# EAGLE board Base_Block-GiantPanel-v10 (EAGLE 6.6.0), part 1 of 15
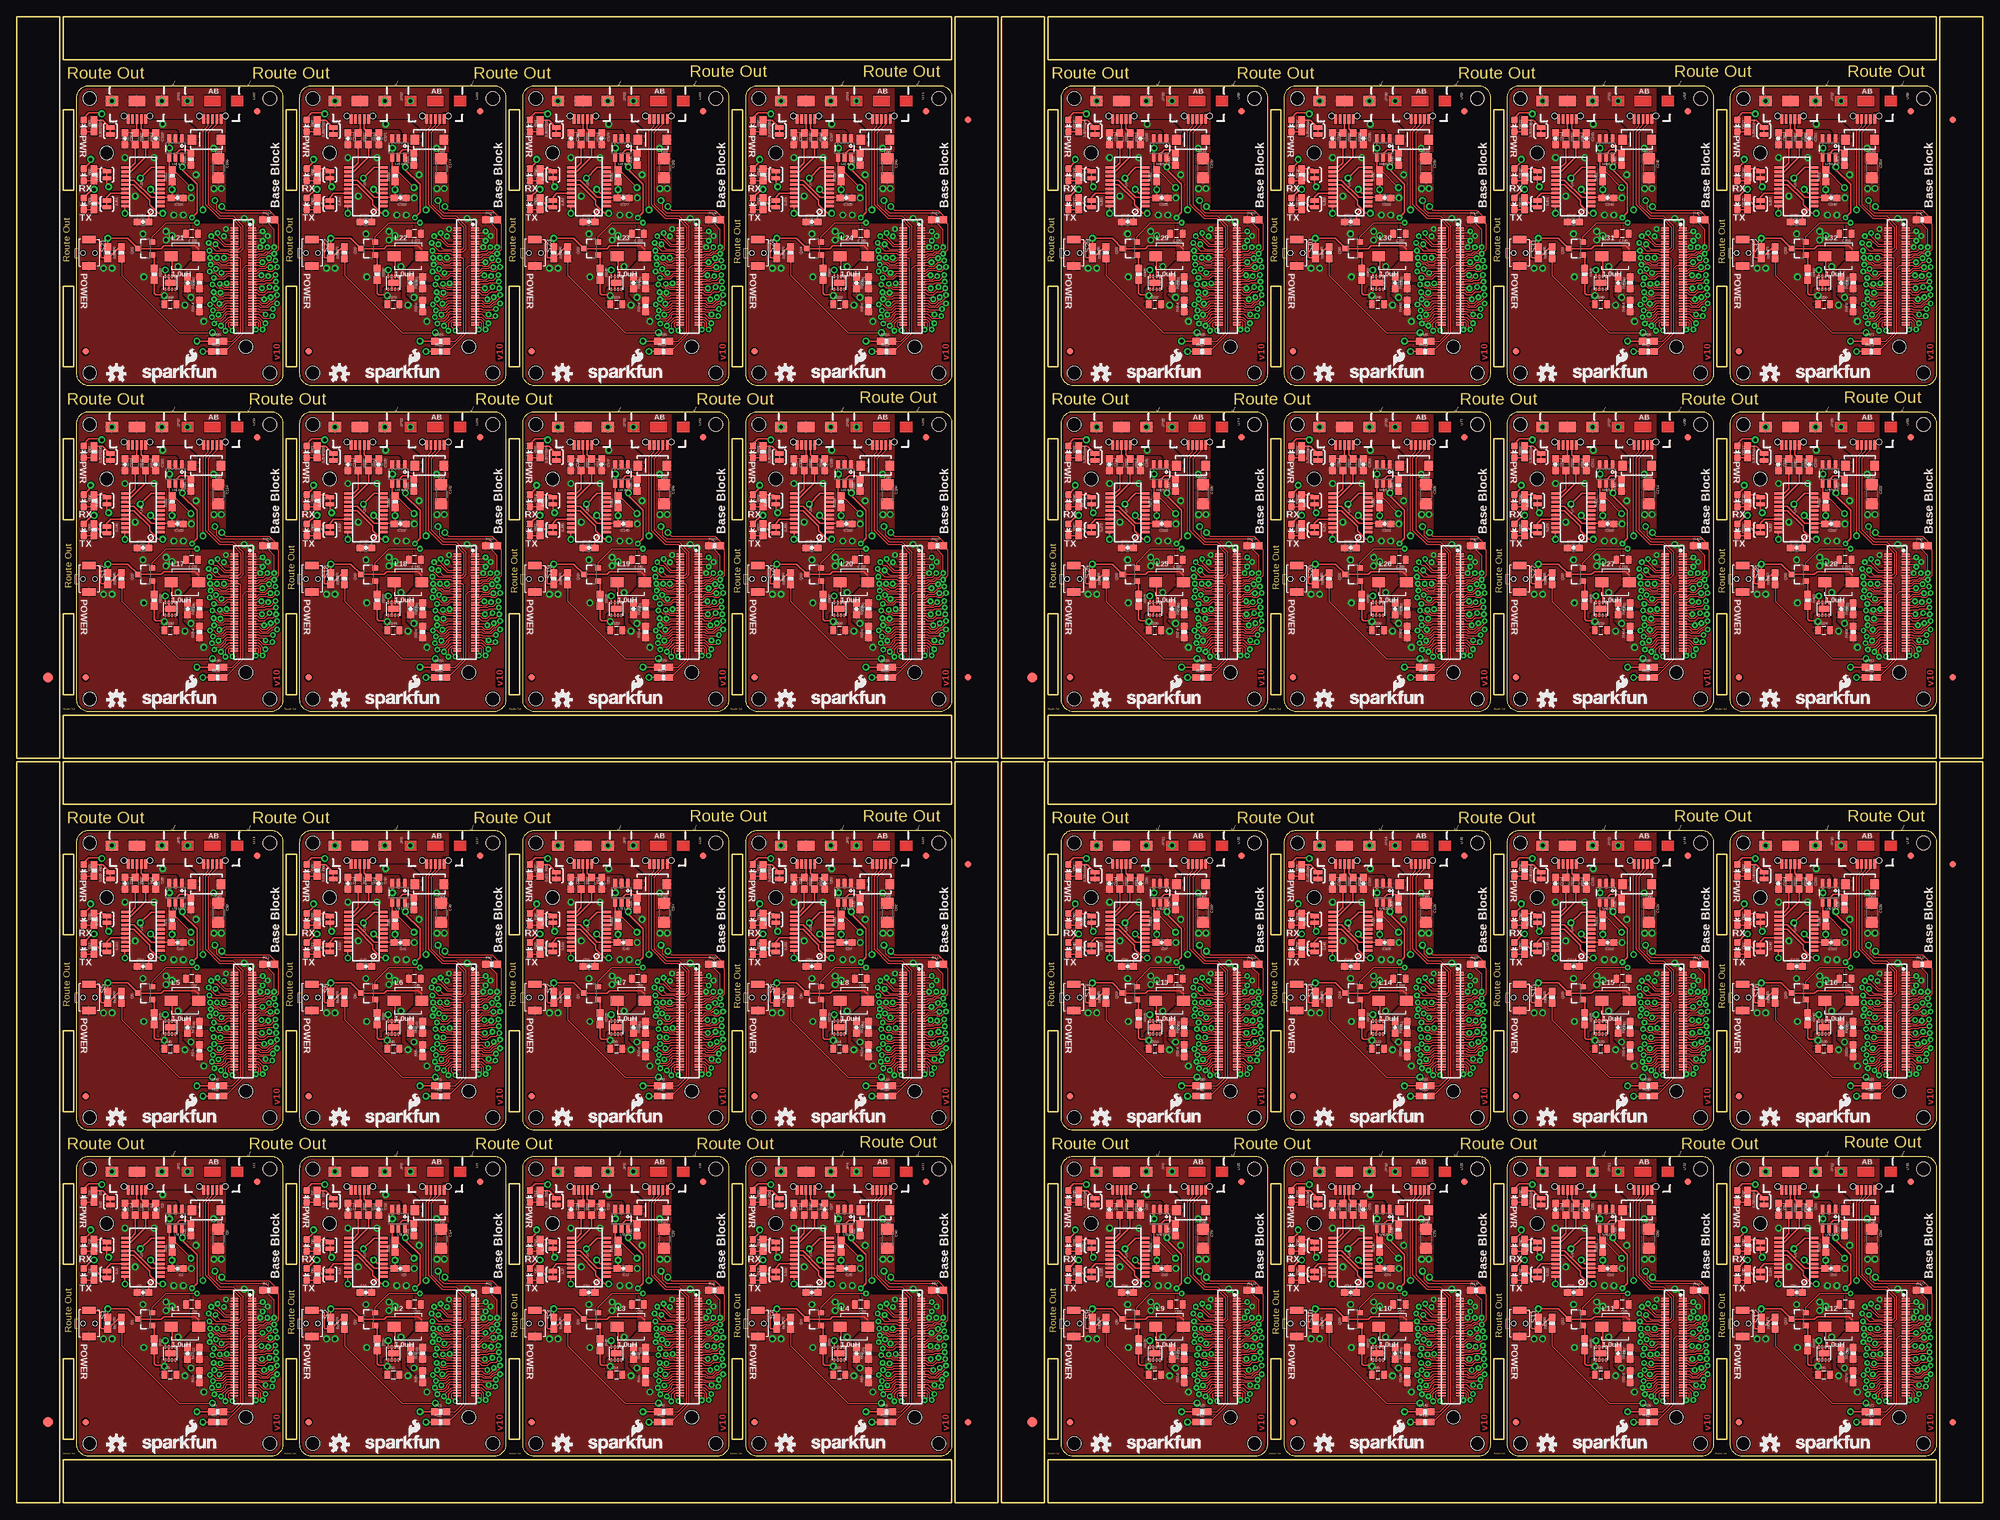
[diagram p0: board, top side]
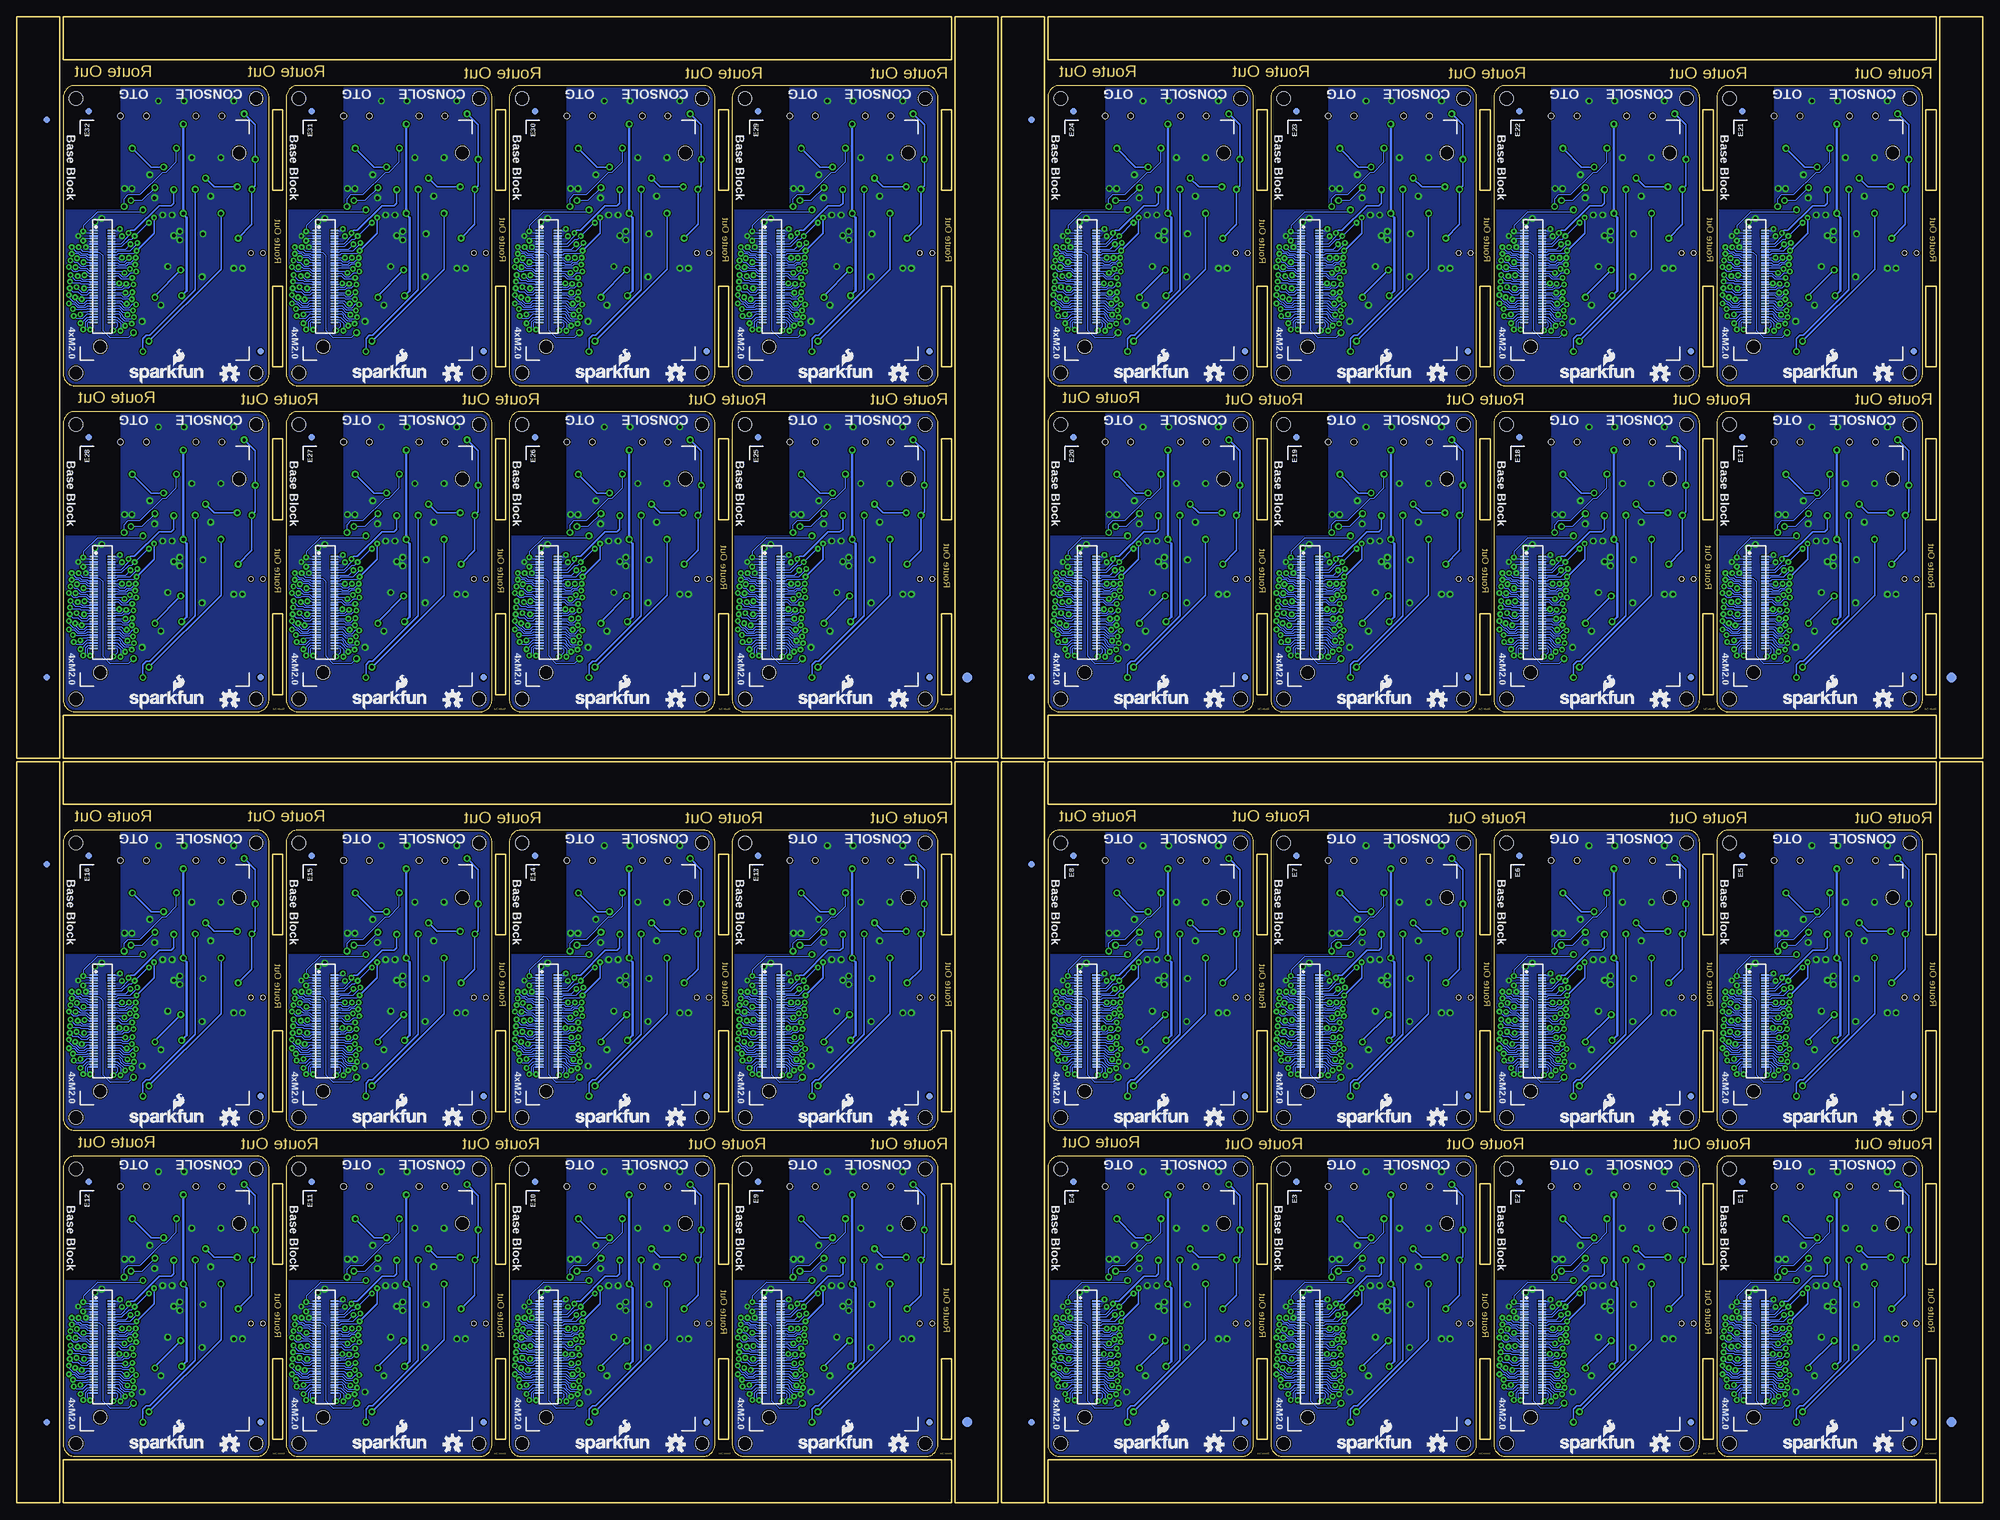
[diagram p1: board, bottom side, seen from below]

Size 291.08 x 219.96 mm. Coordinates in mm from the lower left corner, seen from the top.
Outline: 592 segments
Copper layers (1*16): Top 0.035mm / dielectric 1.5mm / Bottom 0.035mm
Design rules "SparkFun-2-layer *": minimum track width 6mil, minimum drill 13mil, track to track 6mil, track to pad 6mil, pad to pad 6mil, via to via 6mil, smd to smd 6mil, copper to edge 8mil, drill to drill 8mil, minimum pad ring 12mil, minimum via ring 10mil, stop-mask expansion 4mil, vias tented up to drill 20mil, thermal gap 6mil
Holes 2 mm at 37.47,8.76 10.79,8.76 10.79,49.4 37.47,49.4 70.48,8.76 43.81,8.76 43.81,49.4 70.48,49.4 103.5,8.76 76.83,8.76 76.83,49.4 103.5,49.4 136.53,8.76 109.86,8.76 109.86,49.4 136.53,49.4 37.47,57.02 10.79,57.02 10.79,97.66 37.47,97.66 70.48,57.02 43.81,57.02 43.81,97.66 70.48,97.66 103.5,57.02 76.83,57.02 76.83,97.66 103.5,97.66 136.53,57.02 109.86,57.02 109.86,97.66 136.53,97.66 183.26,8.76 156.59,8.76 156.59,49.4 183.26,49.4 216.28,8.76 189.61,8.76 189.61,49.4 216.28,49.4 249.3,8.76 222.63,8.76 222.63,49.4 249.3,49.4 282.32,8.76 255.65,8.76 255.65,49.4 282.32,49.4 183.26,57.02 156.59,57.02 156.59,97.66 183.26,97.66 216.28,57.02 189.61,57.02 189.61,97.66 216.28,97.66 249.3,57.02 222.63,57.02 222.63,97.66 249.3,97.66 282.32,57.02 255.65,57.02 255.65,97.66 282.32,97.66 37.47,119 10.79,119 10.79,159.64 37.47,159.64 70.48,119 43.81,119 43.81,159.64 70.48,159.64 103.5,119 76.83,119 76.83,159.64 103.5,159.64 136.53,119 109.86,119 109.86,159.64 136.53,159.64 37.47,167.26 10.79,167.26 10.79,207.9 37.47,207.9 70.48,167.26 43.81,167.26 43.81,207.9 70.48,207.9 103.5,167.26 76.83,167.26 76.83,207.9 103.5,207.9 136.53,167.26 109.86,167.26 109.86,207.9 136.53,207.9 183.26,119 156.59,119 156.59,159.64 183.26,159.64 216.28,119 189.61,119 189.61,159.64 216.28,159.64 249.3,119 222.63,119 222.63,159.64 249.3,159.64 282.32,119 255.65,119 255.65,159.64 282.32,159.64 183.26,167.26 156.59,167.26 156.59,207.9 183.26,207.9 216.28,167.26 189.61,167.26 189.61,207.9 216.28,207.9 249.3,167.26 222.63,167.26 222.63,207.9 249.3,207.9 282.32,167.26 255.65,167.26 255.65,207.9 282.32,207.9
tRestrict: area 31,33 to 39.4,51.3; area 64,33 to 72.4,51.3; area 97,33 to 105.4,51.3; area 130,33 to 138.4,51.3; area 31,81.3 to 39.4,99.6; area 64,81.3 to 72.4,99.6; area 97,81.3 to 105.4,99.6; area 130,81.3 to 138.4,99.6; area 176.8,33 to 185.2,51.3; area 209.8,33 to 218.2,51.3; area 242.8,33 to 251.2,51.3; area 275.8,33 to 284.2,51.3; 20 more areas; 64 lines
bRestrict: area 31,33 to 39.4,51.3; area 64,33 to 72.4,51.3; area 97,33 to 105.4,51.3; area 130,33 to 138.4,51.3; area 31,81.3 to 39.4,99.6; area 64,81.3 to 72.4,99.6; area 97,81.3 to 105.4,99.6; area 130,81.3 to 138.4,99.6; area 176.8,33 to 185.2,51.3; area 209.8,33 to 218.2,51.3; area 242.8,33 to 251.2,51.3; area 275.8,33 to 284.2,51.3; 20 more areas

## Footprints (pad centres in the part's own frame; a part is rotated, then mirrored left to right if it is on the bottom)
0603-CAP = smd 1.1 x 1: 1 -0.85,0; 2 0.85,0
0805 = smd 0.8 x 1.2: 1 -0.9,0; 2 0.9,0
1206 = smd 1.6 x 1.8: 1 -1.4,0; 2 1.4,0
LED-0603 = smd 1 x 1: A 0,-0.877; C 0,0.877
SMA-DIODE = smd 1.27 x 1.47: A -2.15,0; C 2.15,0
EDISON_DAUGHTER = smd 1.14 x 0.2: 1 1.98,19.17; 2 4.62,19.17; 3 1.98,18.77; 4 4.62,18.77; 5 1.98,18.37; 6 4.62,18.37; 7 1.98,17.97; 8 4.62,17.97; 9 1.98,17.57; 10 4.62,17.57; 11 1.98,17.17; 12 4.62,17.17; 13 1.98,16.77; 14 4.62,16.77; 15 1.98,16.37; 16 4.62,16.37; 17 1.98,15.97; 18 4.62,15.97; 19 1.98,15.57; 20 4.62,15.57; 21 1.98,15.17; 22 4.62,15.17; 23 1.98,14.77; 24 4.62,14.77; 25 1.98,14.37; 26 4.62,14.37; 27 1.98,13.97; 28 4.62,13.97; 29 1.98,13.57; 30 4.62,13.57; 31 1.98,13.17; 32 4.62,13.17; 33 1.98,12.77; 34 4.62,12.77; 35 1.98,12.37; 36 4.62,12.37; 37 1.98,11.97; 38 4.62,11.97; 39 1.98,11.57; 40 4.62,11.57; 41 1.98,11.17; 42 4.62,11.17; 43 1.98,10.77; 44 4.62,10.77; 45 1.98,10.37; 46 4.62,10.37; 47 1.98,9.97; 48 4.62,9.97; 49 1.98,9.57; 50 4.62,9.57; 51 1.98,9.17; 52 4.62,9.17; 53 1.98,8.77; 54 4.62,8.77; 55 1.98,8.37; 56 4.62,8.37; 57 1.98,7.97; 58 4.62,7.97; 59 1.98,7.57; 60 4.62,7.57; 61 1.98,7.17; 62 4.62,7.17; 63 1.98,6.77; 64 4.62,6.77; 65 1.98,6.37; 66 4.62,6.37; 67 1.98,5.97; 68 4.62,5.97; 69 1.98,5.57; 70 4.62,5.57 | hole 2: 23.53,30.67; 2.93,1.98
FIDUCIAL-1.5X3 = smd 1.5 x 1.5: 1 0,0
FIDUCIAL-1X2 = smd 1 x 1: 1 0,0
USB-B-MICRO-SMD_V03 = smd 1.4 x 0.4: D+1 2.7,0; D-1 2.7,0.65; GND1 2.7,-1.3; ID1 2.7,-0.65; VBUS1 2.7,1.3 | smd 1.5 x 1.8: SHIELD1 0,3.7; SHIELD2 0,-3.7 | smd 1.5 x 2.5: SHIELD3 0,0 | hole 0.85: 2.2,1.9; 2.2,-1.9
INDUCTOR-SRP4020 = smd 1.9 x 1.5: P$1 -2.05,0; P$2 2.05,0
SOT23-3 = smd 0.8 x 0.9: 1 -0.95,-1; 2 0.95,-1; 3 0,1.1
0603 = smd 1.1 x 1: 1 -0.85,0; 2 0.85,0
0603-RES = smd 1.1 x 1: 1 -0.85,0; 2 0.85,0
TACTILE_SWITCH-SMD-RIGHT-ANGLE = smd 1.1 x 2: 1 -1.95,0; 2 1.95,0 | hole 0.7: 0,0.9; 0,-0.9
PAD-JUMPER-2-NC_BY_TRACE_YES_SILK = smd 0.635 x 1.27: 1 -0.508,0; 2 0.508,0
SSOP20_L = smd 0.381 x 1.143: 1 -2.857,-2.68; 2 -2.223,-2.68; 3 -1.587,-2.68; 4 -0.953,-2.68; 5 -0.318,-2.68; 6 0.318,-2.68; 7 0.953,-2.68; 8 1.587,-2.68; 9 2.223,-2.68; 10 2.857,-2.68; 11 2.857,2.68; 12 2.223,2.68; 13 1.587,2.68; 14 0.953,2.68; 15 0.318,2.68; 16 -0.318,2.68; 17 -0.953,2.68; 18 -1.587,2.68; 19 -2.223,2.68; 20 -2.857,2.68
USB-AB-MICRO-SMD_V03 = smd 1.4 x 0.4: D+1 2.7,0; D-1 2.7,0.65; GND1 2.7,-1.3; ID1 2.7,-0.65; VBUS1 2.7,1.3 | hole 0.85: 2.2,1.9; 2.2,-1.9
WSON-8-PAD = smd 0.25 x 0.5: 1 -0.75,-0.95; 2 -0.25,-0.95; 3 0.25,-0.95; 4 0.75,-0.95; 5 0.75,0.95; 6 0.25,0.95; 7 -0.25,0.95; 8 -0.75,0.95 | smd 1.6 x 0.9: PAD 0,0
SOT23-6 = smd 0.55 x 1.35: 1 -0.95,-1.375; 2 0,-1.375; 3 0.95,-1.375; 4 0.95,1.375; 5 0,1.375; 6 -0.95,1.375
DF40C-70DP-0.4(51) = smd 0.2 x 1.14 bottom: 1 6.8,1.32; 2 6.8,-1.32; 3 6.4,1.32; 4 6.4,-1.32; 5 6,1.32; 6 6,-1.32; 7 5.6,1.32; 8 5.6,-1.32; 9 5.2,1.32; 10 5.2,-1.32; 11 4.8,1.32; 12 4.8,-1.32; 13 4.4,1.32; 14 4.4,-1.32; 15 4,1.32; 16 4,-1.32; 17 3.6,1.32; 18 3.6,-1.32; 19 3.2,1.32; 20 3.2,-1.32; 21 2.8,1.32; 22 2.8,-1.32; 23 2.4,1.32; 24 2.4,-1.32; 25 2,1.32; 26 2,-1.32; 27 1.6,1.32; 28 1.6,-1.32; 29 1.2,1.32; 30 1.2,-1.32; 31 0.8,1.32; 32 0.8,-1.32; 33 0.4,1.32; 34 0.4,-1.32; 35 0,1.32; 36 0,-1.32; 37 -0.4,1.32; 38 -0.4,-1.32; 39 -0.8,1.32; 40 -0.8,-1.32; 41 -1.2,1.32; 42 -1.2,-1.32; 43 -1.6,1.32; 44 -1.6,-1.32; 45 -2,1.32; 46 -2,-1.32; 47 -2.4,1.32; 48 -2.4,-1.32; 49 -2.8,1.32; 50 -2.8,-1.32; 51 -3.2,1.32; 52 -3.2,-1.32; 53 -3.6,1.32; 54 -3.6,-1.32; 55 -4,1.32; 56 -4,-1.32; 57 -4.4,1.32; 58 -4.4,-1.32; 59 -4.8,1.32; 60 -4.8,-1.32; 61 -5.2,1.32; 62 -5.2,-1.32; 63 -5.6,1.32; 64 -5.6,-1.32; 65 -6,1.32; 66 -6,-1.32; 67 -6.4,1.32; 68 -6.4,-1.32; 69 -6.8,1.32; 70 -6.8,-1.32; NC1 7.2,1.32; NC2 7.2,-1.32; NC3 -7.2,-1.32; NC4 -7.2,1.32

## Placement (x,y rotation side)
C1  0.1uF  [0603-CAP]  23.75,34.67 180 top
C2  0.1uF  [0603-CAP]  18.67,31.11 0 top
C3  47pF  [0603-CAP]  20.57,43.43 270 top
C4  47pF  [0603-CAP]  16,43.43 270 top
C5  0.1uF  [0603-CAP]  56.77,34.67 180 top
C6  22uF  [0805]  25.91,29.34 180 top
C7  47pF  [0603-CAP]  25.27,22.1 270 top
C8  10uF  [1206]  29.82,39.07 270 top
C9  22uF  [0805]  22.73,18.92 0 top
C10  0.1uF  [0603-CAP]  51.69,31.11 0 top
C11  47pF  [0603-CAP]  53.59,43.43 270 top
C12  47pF  [0603-CAP]  49.02,43.43 270 top
C13  22uF  [0805]  58.93,29.34 180 top
C14  10uF  [1206]  62.84,39.07 270 top
C15  47pF  [0603-CAP]  58.29,22.1 270 top
C16  22uF  [0805]  55.75,18.92 0 top
C17  0.1uF  [0603-CAP]  89.79,34.67 180 top
C18  0.1uF  [0603-CAP]  84.71,31.11 0 top
C19  47pF  [0603-CAP]  86.61,43.43 270 top
C20  47pF  [0603-CAP]  82.04,43.43 270 top
C21  22uF  [0805]  91.95,29.34 180 top
C22  10uF  [1206]  95.86,39.07 270 top
C23  47pF  [0603-CAP]  91.31,22.1 270 top
C24  22uF  [0805]  88.77,18.92 0 top
C25  0.1uF  [0603-CAP]  122.81,34.67 180 top
C26  0.1uF  [0603-CAP]  117.73,31.11 0 top
C27  47pF  [0603-CAP]  119.63,43.43 270 top
C28  47pF  [0603-CAP]  115.06,43.43 270 top
C29  22uF  [0805]  124.97,29.34 180 top
C30  10uF  [1206]  128.88,39.07 270 top
C31  47pF  [0603-CAP]  124.33,22.1 270 top
C32  22uF  [0805]  121.79,18.92 0 top
C33  0.1uF  [0603-CAP]  23.75,82.93 180 top
C34  0.1uF  [0603-CAP]  18.67,79.38 0 top
C35  47pF  [0603-CAP]  20.57,91.69 270 top
C36  47pF  [0603-CAP]  16,91.69 270 top
C37  22uF  [0805]  25.91,77.6 180 top
C38  10uF  [1206]  29.82,87.33 270 top
C39  47pF  [0603-CAP]  25.27,70.36 270 top
C40  22uF  [0805]  22.73,67.18 0 top
C41  0.1uF  [0603-CAP]  56.77,82.93 180 top
C42  0.1uF  [0603-CAP]  51.69,79.38 0 top
C43  47pF  [0603-CAP]  53.59,91.69 270 top
C44  47pF  [0603-CAP]  49.02,91.69 270 top
C45  22uF  [0805]  58.93,77.6 180 top
C46  10uF  [1206]  62.84,87.33 270 top
C47  47pF  [0603-CAP]  58.29,70.36 270 top
C48  22uF  [0805]  55.75,67.18 0 top
C49  0.1uF  [0603-CAP]  89.79,82.93 180 top
C50  0.1uF  [0603-CAP]  84.71,79.38 0 top
C51  47pF  [0603-CAP]  86.61,91.69 270 top
C52  47pF  [0603-CAP]  82.04,91.69 270 top
C53  22uF  [0805]  91.95,77.6 180 top
C54  10uF  [1206]  95.86,87.33 270 top
C55  47pF  [0603-CAP]  91.31,70.36 270 top
C56  22uF  [0805]  88.77,67.18 0 top
C57  0.1uF  [0603-CAP]  122.81,82.93 180 top
C58  0.1uF  [0603-CAP]  117.73,79.38 0 top
C59  47pF  [0603-CAP]  119.63,91.69 270 top
C60  47pF  [0603-CAP]  115.06,91.69 270 top
C61  22uF  [0805]  124.97,77.6 180 top
C62  10uF  [1206]  128.88,87.33 270 top
C63  47pF  [0603-CAP]  124.33,70.36 270 top
C64  22uF  [0805]  121.79,67.18 0 top
C65  0.1uF  [0603-CAP]  169.54,34.67 180 top
C66  0.1uF  [0603-CAP]  164.47,31.11 0 top
C67  47pF  [0603-CAP]  166.37,43.43 270 top
C68  47pF  [0603-CAP]  161.8,43.43 270 top
C69  22uF  [0805]  171.7,29.34 180 top
C70  10uF  [1206]  175.62,39.07 270 top
C71  47pF  [0603-CAP]  171.07,22.1 270 top
C72  22uF  [0805]  168.53,18.92 0 top
C73  0.1uF  [0603-CAP]  202.56,34.67 180 top
C74  0.1uF  [0603-CAP]  197.49,31.11 0 top
C75  47pF  [0603-CAP]  199.39,43.43 270 top
C76  47pF  [0603-CAP]  194.82,43.43 270 top
C77  22uF  [0805]  204.72,29.34 180 top
C78  10uF  [1206]  208.64,39.07 270 top
C79  47pF  [0603-CAP]  204.09,22.1 270 top
C80  22uF  [0805]  201.55,18.92 0 top
C81  0.1uF  [0603-CAP]  235.59,34.67 180 top
C82  0.1uF  [0603-CAP]  230.5,31.11 0 top
C83  47pF  [0603-CAP]  232.41,43.43 270 top
C84  47pF  [0603-CAP]  227.84,43.43 270 top
C85  22uF  [0805]  237.74,29.34 180 top
C86  10uF  [1206]  241.66,39.07 270 top
C87  47pF  [0603-CAP]  237.11,22.1 270 top
C88  22uF  [0805]  234.57,18.92 0 top
C89  0.1uF  [0603-CAP]  268.61,34.67 180 top
C90  0.1uF  [0603-CAP]  263.52,31.11 0 top
C91  47pF  [0603-CAP]  265.43,43.43 270 top
C92  47pF  [0603-CAP]  260.86,43.43 270 top
C93  22uF  [0805]  270.76,29.34 180 top
C94  10uF  [1206]  274.68,39.07 270 top
C95  47pF  [0603-CAP]  270.13,22.1 270 top
C96  22uF  [0805]  267.59,18.92 0 top
C97  0.1uF  [0603-CAP]  169.54,82.93 180 top
C98  0.1uF  [0603-CAP]  164.47,79.38 0 top
C99  47pF  [0603-CAP]  166.37,91.69 270 top
C100  47pF  [0603-CAP]  161.8,91.69 270 top
C101  22uF  [0805]  171.7,77.6 180 top
C102  10uF  [1206]  175.62,87.33 270 top
C103  47pF  [0603-CAP]  171.07,70.36 270 top
C104  22uF  [0805]  168.53,67.18 0 top
C105  0.1uF  [0603-CAP]  202.56,82.93 180 top
C106  0.1uF  [0603-CAP]  197.49,79.38 0 top
C107  47pF  [0603-CAP]  199.39,91.69 270 top
C108  47pF  [0603-CAP]  194.82,91.69 270 top
C109  22uF  [0805]  204.72,77.6 180 top
C110  10uF  [1206]  208.64,87.33 270 top
C111  47pF  [0603-CAP]  204.09,70.36 270 top
C112  22uF  [0805]  201.55,67.18 0 top
C113  0.1uF  [0603-CAP]  235.59,82.93 180 top
C114  0.1uF  [0603-CAP]  230.5,79.38 0 top
C115  47pF  [0603-CAP]  232.41,91.69 270 top
C116  47pF  [0603-CAP]  227.84,91.69 270 top
C117  22uF  [0805]  237.74,77.6 180 top
C118  10uF  [1206]  241.66,87.33 270 top
C119  47pF  [0603-CAP]  237.11,70.36 270 top
C120  22uF  [0805]  234.57,67.18 0 top
C121  0.1uF  [0603-CAP]  268.61,82.93 180 top
C122  0.1uF  [0603-CAP]  263.52,79.38 0 top
C123  47pF  [0603-CAP]  265.43,91.69 270 top
C124  47pF  [0603-CAP]  260.86,91.69 270 top
C125  22uF  [0805]  270.76,77.6 180 top
C126  10uF  [1206]  274.68,87.33 270 top
C127  47pF  [0603-CAP]  270.13,70.36 270 top
C128  22uF  [0805]  267.59,67.18 0 top
C129  0.1uF  [0603-CAP]  23.75,144.91 180 top
C130  0.1uF  [0603-CAP]  18.67,141.35 0 top
C131  47pF  [0603-CAP]  20.57,153.67 270 top
C132  47pF  [0603-CAP]  16,153.67 270 top
C133  22uF  [0805]  25.91,139.57 180 top
C134  10uF  [1206]  29.82,149.3 270 top
C135  47pF  [0603-CAP]  25.27,132.33 270 top
C136  22uF  [0805]  22.73,129.16 0 top
C137  0.1uF  [0603-CAP]  56.77,144.91 180 top
C138  0.1uF  [0603-CAP]  51.69,141.35 0 top
C139  47pF  [0603-CAP]  53.59,153.67 270 top
C140  47pF  [0603-CAP]  49.02,153.67 270 top
C141  22uF  [0805]  58.93,139.57 180 top
C142  10uF  [1206]  62.84,149.3 270 top
C143  47pF  [0603-CAP]  58.29,132.33 270 top
C144  22uF  [0805]  55.75,129.16 0 top
C145  0.1uF  [0603-CAP]  89.79,144.91 180 top
C146  0.1uF  [0603-CAP]  84.71,141.35 0 top
C147  47pF  [0603-CAP]  86.61,153.67 270 top
C148  47pF  [0603-CAP]  82.04,153.67 270 top
C149  22uF  [0805]  91.95,139.57 180 top
C150  10uF  [1206]  95.86,149.3 270 top
C151  47pF  [0603-CAP]  91.31,132.33 270 top
C152  22uF  [0805]  88.77,129.16 0 top
C153  0.1uF  [0603-CAP]  122.81,144.91 180 top
C154  0.1uF  [0603-CAP]  117.73,141.35 0 top
C155  47pF  [0603-CAP]  119.63,153.67 270 top
C156  47pF  [0603-CAP]  115.06,153.67 270 top
C157  22uF  [0805]  124.97,139.57 180 top
C158  10uF  [1206]  128.88,149.3 270 top
C159  47pF  [0603-CAP]  124.33,132.33 270 top
C160  22uF  [0805]  121.79,129.16 0 top
C161  0.1uF  [0603-CAP]  23.75,193.17 180 top
C162  0.1uF  [0603-CAP]  18.67,189.61 0 top
C163  47pF  [0603-CAP]  20.57,201.93 270 top
C164  47pF  [0603-CAP]  16,201.93 270 top
C165  22uF  [0805]  25.91,187.83 180 top
C166  10uF  [1206]  29.82,197.56 270 top
C167  47pF  [0603-CAP]  25.27,180.59 270 top
C168  22uF  [0805]  22.73,177.42 0 top
C169  0.1uF  [0603-CAP]  56.77,193.17 180 top
C170  0.1uF  [0603-CAP]  51.69,189.61 0 top
C171  47pF  [0603-CAP]  53.59,201.93 270 top
C172  47pF  [0603-CAP]  49.02,201.93 270 top
C173  22uF  [0805]  58.93,187.83 180 top
C174  10uF  [1206]  62.84,197.56 270 top
C175  47pF  [0603-CAP]  58.29,180.59 270 top
C176  22uF  [0805]  55.75,177.42 0 top
C177  0.1uF  [0603-CAP]  89.79,193.17 180 top
C178  0.1uF  [0603-CAP]  84.71,189.61 0 top
C179  47pF  [0603-CAP]  86.61,201.93 270 top
C180  47pF  [0603-CAP]  82.04,201.93 270 top
C181  22uF  [0805]  91.95,187.83 180 top
C182  10uF  [1206]  95.86,197.56 270 top
C183  47pF  [0603-CAP]  91.31,180.59 270 top
C184  22uF  [0805]  88.77,177.42 0 top
C185  0.1uF  [0603-CAP]  122.81,193.17 180 top
C186  0.1uF  [0603-CAP]  117.73,189.61 0 top
C187  47pF  [0603-CAP]  119.63,201.93 270 top
C188  47pF  [0603-CAP]  115.06,201.93 270 top
C189  22uF  [0805]  124.97,187.83 180 top
C190  10uF  [1206]  128.88,197.56 270 top
C191  47pF  [0603-CAP]  124.33,180.59 270 top
C192  22uF  [0805]  121.79,177.42 0 top
C193  0.1uF  [0603-CAP]  169.54,144.91 180 top
C194  0.1uF  [0603-CAP]  164.47,141.35 0 top
C195  47pF  [0603-CAP]  166.37,153.67 270 top
C196  47pF  [0603-CAP]  161.8,153.67 270 top
C197  22uF  [0805]  171.7,139.57 180 top
C198  10uF  [1206]  175.62,149.3 270 top
C199  47pF  [0603-CAP]  171.07,132.33 270 top
C200  22uF  [0805]  168.53,129.16 0 top
C201  0.1uF  [0603-CAP]  202.56,144.91 180 top
C202  0.1uF  [0603-CAP]  197.49,141.35 0 top
C203  47pF  [0603-CAP]  199.39,153.67 270 top
C204  47pF  [0603-CAP]  194.82,153.67 270 top
C205  22uF  [0805]  204.72,139.57 180 top
C206  10uF  [1206]  208.64,149.3 270 top
C207  47pF  [0603-CAP]  204.09,132.33 270 top
C208  22uF  [0805]  201.55,129.16 0 top
C209  0.1uF  [0603-CAP]  235.59,144.91 180 top
C210  0.1uF  [0603-CAP]  230.5,141.35 0 top
C211  47pF  [0603-CAP]  232.41,153.67 270 top
C212  47pF  [0603-CAP]  227.84,153.67 270 top
C213  22uF  [0805]  237.74,139.57 180 top
C214  10uF  [1206]  241.66,149.3 270 top
C215  47pF  [0603-CAP]  237.11,132.33 270 top
C216  22uF  [0805]  234.57,129.16 0 top
C217  0.1uF  [0603-CAP]  268.61,144.91 180 top
C218  0.1uF  [0603-CAP]  263.52,141.35 0 top
C219  47pF  [0603-CAP]  265.43,153.67 270 top
C220  47pF  [0603-CAP]  260.86,153.67 270 top
C221  22uF  [0805]  270.76,139.57 180 top
C222  10uF  [1206]  274.68,149.3 270 top
C223  47pF  [0603-CAP]  270.13,132.33 270 top
C224  22uF  [0805]  267.59,129.16 0 top
C225  0.1uF  [0603-CAP]  169.54,193.17 180 top
C226  0.1uF  [0603-CAP]  164.47,189.61 0 top
C227  47pF  [0603-CAP]  166.37,201.93 270 top
C228  47pF  [0603-CAP]  161.8,201.93 270 top
C229  22uF  [0805]  171.7,187.83 180 top
C230  10uF  [1206]  175.62,197.56 270 top
C231  47pF  [0603-CAP]  171.07,180.59 270 top
C232  22uF  [0805]  168.53,177.42 0 top
C233  0.1uF  [0603-CAP]  202.56,193.17 180 top
C234  0.1uF  [0603-CAP]  197.49,189.61 0 top
C235  47pF  [0603-CAP]  199.39,201.93 270 top
C236  47pF  [0603-CAP]  194.82,201.93 270 top
C237  22uF  [0805]  204.72,187.83 180 top
C238  10uF  [1206]  208.64,197.56 270 top
C239  47pF  [0603-CAP]  204.09,180.59 270 top
C240  22uF  [0805]  201.55,177.42 0 top
C241  0.1uF  [0603-CAP]  235.59,193.17 180 top
C242  0.1uF  [0603-CAP]  230.5,189.61 0 top
C243  47pF  [0603-CAP]  232.41,201.93 270 top
C244  47pF  [0603-CAP]  227.84,201.93 270 top
C245  22uF  [0805]  237.74,187.83 180 top
C246  10uF  [1206]  241.66,197.56 270 top
C247  47pF  [0603-CAP]  237.11,180.59 270 top
C248  22uF  [0805]  234.57,177.42 0 top
C249  0.1uF  [0603-CAP]  268.61,193.17 180 top
C250  0.1uF  [0603-CAP]  263.52,189.61 0 top
C251  47pF  [0603-CAP]  265.43,201.93 270 top
C252  47pF  [0603-CAP]  260.86,201.93 270 top
C253  22uF  [0805]  270.76,187.83 180 top
C254  10uF  [1206]  274.68,197.56 270 top
C255  47pF  [0603-CAP]  270.13,180.59 270 top
C256  22uF  [0805]  267.59,177.42 0 top
D1  RED  [LED-0603]  9.91,33.78 180 top
D2  YELLOW  [LED-0603]  9.91,38.1 180 top
D3  BLUE  [LED-0603]  9.91,45.34 180 top
D4  [SMA-DIODE]  28.07,43.31 180 top
D5  RED  [LED-0603]  42.93,33.78 180 top
D6  YELLOW  [LED-0603]  42.93,38.1 180 top
D7  BLUE  [LED-0603]  42.93,45.34 180 top
D8  [SMA-DIODE]  61.09,43.31 180 top
D9  RED  [LED-0603]  75.95,33.78 180 top
D10  YELLOW  [LED-0603]  75.95,38.1 180 top
D11  BLUE  [LED-0603]  75.95,45.34 180 top
D12  [SMA-DIODE]  94.11,43.31 180 top
D13  RED  [LED-0603]  108.97,33.78 180 top
D14  YELLOW  [LED-0603]  108.97,38.1 180 top
D15  BLUE  [LED-0603]  108.97,45.34 180 top
D16  [SMA-DIODE]  127.13,43.31 180 top
D17  RED  [LED-0603]  9.91,82.04 180 top
D18  YELLOW  [LED-0603]  9.91,86.36 180 top
D19  BLUE  [LED-0603]  9.91,93.6 180 top
D20  [SMA-DIODE]  28.07,91.57 180 top
D21  RED  [LED-0603]  42.93,82.04 180 top
D22  YELLOW  [LED-0603]  42.93,86.36 180 top
D23  BLUE  [LED-0603]  42.93,93.6 180 top
D24  [SMA-DIODE]  61.09,91.57 180 top
D25  RED  [LED-0603]  75.95,82.04 180 top
D26  YELLOW  [LED-0603]  75.95,86.36 180 top
D27  BLUE  [LED-0603]  75.95,93.6 180 top
D28  [SMA-DIODE]  94.11,91.57 180 top
D29  RED  [LED-0603]  108.97,82.04 180 top
D30  YELLOW  [LED-0603]  108.97,86.36 180 top
D31  BLUE  [LED-0603]  108.97,93.6 180 top
D32  [SMA-DIODE]  127.13,91.57 180 top
D33  RED  [LED-0603]  155.7,33.78 180 top
D34  YELLOW  [LED-0603]  155.7,38.1 180 top
D35  BLUE  [LED-0603]  155.7,45.34 180 top
D36  [SMA-DIODE]  173.86,43.31 180 top
D37  RED  [LED-0603]  188.72,33.78 180 top
D38  YELLOW  [LED-0603]  188.72,38.1 180 top
D39  BLUE  [LED-0603]  188.72,45.34 180 top
D40  [SMA-DIODE]  206.88,43.31 180 top
D41  RED  [LED-0603]  221.74,33.78 180 top
D42  YELLOW  [LED-0603]  221.74,38.1 180 top
D43  BLUE  [LED-0603]  221.74,45.34 180 top
D44  [SMA-DIODE]  239.9,43.31 180 top
D45  RED  [LED-0603]  254.76,33.78 180 top
D46  YELLOW  [LED-0603]  254.76,38.1 180 top
D47  BLUE  [LED-0603]  254.76,45.34 180 top
D48  [SMA-DIODE]  272.92,43.31 180 top
D49  RED  [LED-0603]  155.7,82.04 180 top
D50  YELLOW  [LED-0603]  155.7,86.36 180 top
D51  BLUE  [LED-0603]  155.7,93.6 180 top
D52  [SMA-DIODE]  173.86,91.57 180 top
D53  RED  [LED-0603]  188.72,82.04 180 top
D54  YELLOW  [LED-0603]  188.72,86.36 180 top
D55  BLUE  [LED-0603]  188.72,93.6 180 top
D56  [SMA-DIODE]  206.88,91.57 180 top
D57  RED  [LED-0603]  221.74,82.04 180 top
D58  YELLOW  [LED-0603]  221.74,86.36 180 top
D59  BLUE  [LED-0603]  221.74,93.6 180 top
D60  [SMA-DIODE]  239.9,91.57 180 top
D61  RED  [LED-0603]  254.76,82.04 180 top
D62  YELLOW  [LED-0603]  254.76,86.36 180 top
D63  BLUE  [LED-0603]  254.76,93.6 180 top
D64  [SMA-DIODE]  272.92,91.57 180 top
D65  RED  [LED-0603]  9.91,144.02 180 top
D66  YELLOW  [LED-0603]  9.91,148.34 180 top
D67  BLUE  [LED-0603]  9.91,155.57 180 top
D68  [SMA-DIODE]  28.07,153.54 180 top
D69  RED  [LED-0603]  42.93,144.02 180 top
D70  YELLOW  [LED-0603]  42.93,148.34 180 top
D71  BLUE  [LED-0603]  42.93,155.57 180 top
D72  [SMA-DIODE]  61.09,153.54 180 top
D73  RED  [LED-0603]  75.95,144.02 180 top
D74  YELLOW  [LED-0603]  75.95,148.34 180 top
D75  BLUE  [LED-0603]  75.95,155.57 180 top
D76  [SMA-DIODE]  94.11,153.54 180 top
D77  RED  [LED-0603]  108.97,144.02 180 top
D78  YELLOW  [LED-0603]  108.97,148.34 180 top
D79  BLUE  [LED-0603]  108.97,155.57 180 top
D80  [SMA-DIODE]  127.13,153.54 180 top
D81  RED  [LED-0603]  9.91,192.28 180 top
D82  YELLOW  [LED-0603]  9.91,196.6 180 top
D83  BLUE  [LED-0603]  9.91,203.84 180 top
D84  [SMA-DIODE]  28.07,201.8 180 top
D85  RED  [LED-0603]  42.93,192.28 180 top
D86  YELLOW  [LED-0603]  42.93,196.6 180 top
D87  BLUE  [LED-0603]  42.93,203.84 180 top
D88  [SMA-DIODE]  61.09,201.8 180 top
D89  RED  [LED-0603]  75.95,192.28 180 top
D90  YELLOW  [LED-0603]  75.95,196.6 180 top
D91  BLUE  [LED-0603]  75.95,203.84 180 top
D92  [SMA-DIODE]  94.11,201.8 180 top
D93  RED  [LED-0603]  108.97,192.28 180 top
D94  YELLOW  [LED-0603]  108.97,196.6 180 top
D95  BLUE  [LED-0603]  108.97,203.84 180 top
D96  [SMA-DIODE]  127.13,201.8 180 top
D97  RED  [LED-0603]  155.7,144.02 180 top
D98  YELLOW  [LED-0603]  155.7,148.34 180 top
D99  BLUE  [LED-0603]  155.7,155.57 180 top
D100  [SMA-DIODE]  173.86,153.54 180 top
D101  RED  [LED-0603]  188.72,144.02 180 top
D102  YELLOW  [LED-0603]  188.72,148.34 180 top
D103  BLUE  [LED-0603]  188.72,155.57 180 top
D104  [SMA-DIODE]  206.88,153.54 180 top
D105  RED  [LED-0603]  221.74,144.02 180 top
D106  YELLOW  [LED-0603]  221.74,148.34 180 top
D107  BLUE  [LED-0603]  221.74,155.57 180 top
D108  [SMA-DIODE]  239.9,153.54 180 top
D109  RED  [LED-0603]  254.76,144.02 180 top
D110  YELLOW  [LED-0603]  254.76,148.34 180 top
D111  BLUE  [LED-0603]  254.76,155.57 180 top
D112  [SMA-DIODE]  272.92,153.54 180 top
D113  RED  [LED-0603]  155.7,192.28 180 top
D114  YELLOW  [LED-0603]  155.7,196.6 180 top
D115  BLUE  [LED-0603]  155.7,203.84 180 top
D116  [SMA-DIODE]  173.86,201.8 180 top
D117  RED  [LED-0603]  188.72,192.28 180 top
D118  YELLOW  [LED-0603]  188.72,196.6 180 top
D119  BLUE  [LED-0603]  188.72,203.84 180 top
D120  [SMA-DIODE]  206.88,201.8 180 top
D121  RED  [LED-0603]  221.74,192.28 180 top
D122  YELLOW  [LED-0603]  221.74,196.6 180 top
D123  BLUE  [LED-0603]  221.74,203.84 180 top
D124  [SMA-DIODE]  239.9,201.8 180 top
D125  RED  [LED-0603]  254.76,192.28 180 top
D126  YELLOW  [LED-0603]  254.76,196.6 180 top
D127  BLUE  [LED-0603]  254.76,203.84 180 top
D128  [SMA-DIODE]  272.92,201.8 180 top
E1  EDISON_CONNECTOR_FULLMOUNTING_HOLES  [EDISON_DAUGHTER]  36.83,10.67 0 bottom
E2  EDISON_CONNECTOR_FULLMOUNTING_HOLES  [EDISON_DAUGHTER]  69.85,10.67 0 bottom
E3  EDISON_CONNECTOR_FULLMOUNTING_HOLES  [EDISON_DAUGHTER]  102.87,10.67 0 bottom
E4  EDISON_CONNECTOR_FULLMOUNTING_HOLES  [EDISON_DAUGHTER]  135.89,10.67 0 bottom
E5  EDISON_CONNECTOR_FULLMOUNTING_HOLES  [EDISON_DAUGHTER]  36.83,58.93 0 bottom
E6  EDISON_CONNECTOR_FULLMOUNTING_HOLES  [EDISON_DAUGHTER]  69.85,58.93 0 bottom
E7  EDISON_CONNECTOR_FULLMOUNTING_HOLES  [EDISON_DAUGHTER]  102.87,58.93 0 bottom
E8  EDISON_CONNECTOR_FULLMOUNTING_HOLES  [EDISON_DAUGHTER]  135.89,58.93 0 bottom
E9  EDISON_CONNECTOR_FULLMOUNTING_HOLES  [EDISON_DAUGHTER]  182.63,10.67 0 bottom
E10  EDISON_CONNECTOR_FULLMOUNTING_HOLES  [EDISON_DAUGHTER]  215.65,10.67 0 bottom
E11  EDISON_CONNECTOR_FULLMOUNTING_HOLES  [EDISON_DAUGHTER]  248.67,10.67 0 bottom
E12  EDISON_CONNECTOR_FULLMOUNTING_HOLES  [EDISON_DAUGHTER]  281.69,10.67 0 bottom
E13  EDISON_CONNECTOR_FULLMOUNTING_HOLES  [EDISON_DAUGHTER]  182.63,58.93 0 bottom
E14  EDISON_CONNECTOR_FULLMOUNTING_HOLES  [EDISON_DAUGHTER]  215.65,58.93 0 bottom
E15  EDISON_CONNECTOR_FULLMOUNTING_HOLES  [EDISON_DAUGHTER]  248.67,58.93 0 bottom
E16  EDISON_CONNECTOR_FULLMOUNTING_HOLES  [EDISON_DAUGHTER]  281.69,58.93 0 bottom
E17  EDISON_CONNECTOR_FULLMOUNTING_HOLES  [EDISON_DAUGHTER]  36.83,120.9 0 bottom
E18  EDISON_CONNECTOR_FULLMOUNTING_HOLES  [EDISON_DAUGHTER]  69.85,120.9 0 bottom
E19  EDISON_CONNECTOR_FULLMOUNTING_HOLES  [EDISON_DAUGHTER]  102.87,120.9 0 bottom
E20  EDISON_CONNECTOR_FULLMOUNTING_HOLES  [EDISON_DAUGHTER]  135.89,120.9 0 bottom
E21  EDISON_CONNECTOR_FULLMOUNTING_HOLES  [EDISON_DAUGHTER]  36.83,169.16 0 bottom
E22  EDISON_CONNECTOR_FULLMOUNTING_HOLES  [EDISON_DAUGHTER]  69.85,169.16 0 bottom
E23  EDISON_CONNECTOR_FULLMOUNTING_HOLES  [EDISON_DAUGHTER]  102.87,169.16 0 bottom
E24  EDISON_CONNECTOR_FULLMOUNTING_HOLES  [EDISON_DAUGHTER]  135.89,169.16 0 bottom
E25  EDISON_CONNECTOR_FULLMOUNTING_HOLES  [EDISON_DAUGHTER]  182.63,120.9 0 bottom
E26  EDISON_CONNECTOR_FULLMOUNTING_HOLES  [EDISON_DAUGHTER]  215.65,120.9 0 bottom
E27  EDISON_CONNECTOR_FULLMOUNTING_HOLES  [EDISON_DAUGHTER]  248.67,120.9 0 bottom
E28  EDISON_CONNECTOR_FULLMOUNTING_HOLES  [EDISON_DAUGHTER]  281.69,120.9 0 bottom
E29  EDISON_CONNECTOR_FULLMOUNTING_HOLES  [EDISON_DAUGHTER]  182.63,169.16 0 bottom
E30  EDISON_CONNECTOR_FULLMOUNTING_HOLES  [EDISON_DAUGHTER]  215.65,169.16 0 bottom
E31  EDISON_CONNECTOR_FULLMOUNTING_HOLES  [EDISON_DAUGHTER]  248.67,169.16 0 bottom
E32  EDISON_CONNECTOR_FULLMOUNTING_HOLES  [EDISON_DAUGHTER]  281.69,169.16 0 bottom
E$1  [FIDUCIAL-1.5X3]  4.57,11.94 0 top
E$2  [FIDUCIAL-1.5X3]  4.57,11.94 0 bottom
E$3  [FIDUCIAL-1X2]  140.84,94.49 180 bottom
E$4  [FIDUCIAL-1X2]  140.84,11.94 0 top
E$5  [FIDUCIAL-1X2]  140.84,94.49 180 top
E$6  [FIDUCIAL-1X2]  140.84,11.94 0 bottom
E$7  [FIDUCIAL-1X2]  286.64,11.94 0 top
E$8  [FIDUCIAL-1X2]  286.64,94.49 180 top
E$9  [FIDUCIAL-1.5X3]  150.37,11.94 0 top
E$10  [FIDUCIAL-1.5X3]  150.37,11.94 0 bottom
E$11  [FIDUCIAL-1X2]  286.64,94.49 180 bottom
E$12  [FIDUCIAL-1X2]  286.64,11.94 0 bottom
E$13  [FIDUCIAL-1X2]  140.84,122.17 0 top
E$14  [FIDUCIAL-1X2]  140.84,204.72 180 top
E$15  [FIDUCIAL-1.5X3]  4.57,122.17 0 top
E$16  [FIDUCIAL-1.5X3]  4.57,122.17 0 bottom
E$17  [FIDUCIAL-1X2]  140.84,204.72 180 bottom
E$18  [FIDUCIAL-1X2]  140.84,122.17 0 bottom
E$19  [FIDUCIAL-1X2]  286.64,122.17 0 top
E$20  [FIDUCIAL-1X2]  286.64,204.72 180 top
E$21  [FIDUCIAL-1.5X3]  150.37,122.17 0 top
E$22  [FIDUCIAL-1.5X3]  150.37,122.17 0 bottom
E$23  [FIDUCIAL-1X2]  286.64,204.72 180 bottom
E$24  [FIDUCIAL-1X2]  286.64,122.17 0 bottom
FID1  FIDUCIAL1X2  [FIDUCIAL-1X2]  35.56,47.5 0 top
FID2  FIDUCIAL1X2  [FIDUCIAL-1X2]  10.16,11.94 0 top
FID3  FIDUCIAL1X2  [FIDUCIAL-1X2]  10.16,11.94 0 bottom
FID4  FIDUCIAL1X2  [FIDUCIAL-1X2]  35.56,47.5 0 bottom
FID5  FIDUCIAL1X2  [FIDUCIAL-1X2]  68.58,47.5 0 top
FID6  FIDUCIAL1X2  [FIDUCIAL-1X2]  43.18,11.94 0 top
FID7  FIDUCIAL1X2  [FIDUCIAL-1X2]  43.18,11.94 0 bottom
FID8  FIDUCIAL1X2  [FIDUCIAL-1X2]  68.58,47.5 0 bottom
FID9  FIDUCIAL1X2  [FIDUCIAL-1X2]  101.6,47.5 0 top
FID10  FIDUCIAL1X2  [FIDUCIAL-1X2]  76.2,11.94 0 top
FID11  FIDUCIAL1X2  [FIDUCIAL-1X2]  76.2,11.94 0 bottom
FID12  FIDUCIAL1X2  [FIDUCIAL-1X2]  101.6,47.5 0 bottom
FID13  FIDUCIAL1X2  [FIDUCIAL-1X2]  134.62,47.5 0 top
FID14  FIDUCIAL1X2  [FIDUCIAL-1X2]  109.22,11.94 0 top
FID15  FIDUCIAL1X2  [FIDUCIAL-1X2]  109.22,11.94 0 bottom
FID16  FIDUCIAL1X2  [FIDUCIAL-1X2]  134.62,47.5 0 bottom
FID17  FIDUCIAL1X2  [FIDUCIAL-1X2]  35.56,95.76 0 top
FID18  FIDUCIAL1X2  [FIDUCIAL-1X2]  10.16,60.2 0 top
FID19  FIDUCIAL1X2  [FIDUCIAL-1X2]  10.16,60.2 0 bottom
FID20  FIDUCIAL1X2  [FIDUCIAL-1X2]  35.56,95.76 0 bottom
FID21  FIDUCIAL1X2  [FIDUCIAL-1X2]  68.58,95.76 0 top
FID22  FIDUCIAL1X2  [FIDUCIAL-1X2]  43.18,60.2 0 top
FID23  FIDUCIAL1X2  [FIDUCIAL-1X2]  43.18,60.2 0 bottom
FID24  FIDUCIAL1X2  [FIDUCIAL-1X2]  68.58,95.76 0 bottom
FID25  FIDUCIAL1X2  [FIDUCIAL-1X2]  101.6,95.76 0 top
FID26  FIDUCIAL1X2  [FIDUCIAL-1X2]  76.2,60.2 0 top
FID27  FIDUCIAL1X2  [FIDUCIAL-1X2]  76.2,60.2 0 bottom
FID28  FIDUCIAL1X2  [FIDUCIAL-1X2]  101.6,95.76 0 bottom
FID29  FIDUCIAL1X2  [FIDUCIAL-1X2]  134.62,95.76 0 top
FID30  FIDUCIAL1X2  [FIDUCIAL-1X2]  109.22,60.2 0 top
FID31  FIDUCIAL1X2  [FIDUCIAL-1X2]  109.22,60.2 0 bottom
FID32  FIDUCIAL1X2  [FIDUCIAL-1X2]  134.62,95.76 0 bottom
FID33  FIDUCIAL1X2  [FIDUCIAL-1X2]  181.36,47.5 0 top
FID34  FIDUCIAL1X2  [FIDUCIAL-1X2]  155.96,11.94 0 top
FID35  FIDUCIAL1X2  [FIDUCIAL-1X2]  155.96,11.94 0 bottom
FID36  FIDUCIAL1X2  [FIDUCIAL-1X2]  181.36,47.5 0 bottom
FID37  FIDUCIAL1X2  [FIDUCIAL-1X2]  214.38,47.5 0 top
FID38  FIDUCIAL1X2  [FIDUCIAL-1X2]  188.98,11.94 0 top
FID39  FIDUCIAL1X2  [FIDUCIAL-1X2]  188.98,11.94 0 bottom
FID40  FIDUCIAL1X2  [FIDUCIAL-1X2]  214.38,47.5 0 bottom
FID41  FIDUCIAL1X2  [FIDUCIAL-1X2]  247.4,47.5 0 top
FID42  FIDUCIAL1X2  [FIDUCIAL-1X2]  222,11.94 0 top
FID43  FIDUCIAL1X2  [FIDUCIAL-1X2]  222,11.94 0 bottom
FID44  FIDUCIAL1X2  [FIDUCIAL-1X2]  247.4,47.5 0 bottom
FID45  FIDUCIAL1X2  [FIDUCIAL-1X2]  280.42,47.5 0 top
FID46  FIDUCIAL1X2  [FIDUCIAL-1X2]  255.02,11.94 0 top
FID47  FIDUCIAL1X2  [FIDUCIAL-1X2]  255.02,11.94 0 bottom
FID48  FIDUCIAL1X2  [FIDUCIAL-1X2]  280.42,47.5 0 bottom
FID49  FIDUCIAL1X2  [FIDUCIAL-1X2]  181.36,95.76 0 top
FID50  FIDUCIAL1X2  [FIDUCIAL-1X2]  155.96,60.2 0 top
FID51  FIDUCIAL1X2  [FIDUCIAL-1X2]  155.96,60.2 0 bottom
FID52  FIDUCIAL1X2  [FIDUCIAL-1X2]  181.36,95.76 0 bottom
FID53  FIDUCIAL1X2  [FIDUCIAL-1X2]  214.38,95.76 0 top
FID54  FIDUCIAL1X2  [FIDUCIAL-1X2]  188.98,60.2 0 top
FID55  FIDUCIAL1X2  [FIDUCIAL-1X2]  188.98,60.2 0 bottom
FID56  FIDUCIAL1X2  [FIDUCIAL-1X2]  214.38,95.76 0 bottom
FID57  FIDUCIAL1X2  [FIDUCIAL-1X2]  247.4,95.76 0 top
FID58  FIDUCIAL1X2  [FIDUCIAL-1X2]  222,60.2 0 top
FID59  FIDUCIAL1X2  [FIDUCIAL-1X2]  222,60.2 0 bottom
FID60  FIDUCIAL1X2  [FIDUCIAL-1X2]  247.4,95.76 0 bottom
FID61  FIDUCIAL1X2  [FIDUCIAL-1X2]  280.42,95.76 0 top
FID62  FIDUCIAL1X2  [FIDUCIAL-1X2]  255.02,60.2 0 top
FID63  FIDUCIAL1X2  [FIDUCIAL-1X2]  255.02,60.2 0 bottom
FID64  FIDUCIAL1X2  [FIDUCIAL-1X2]  280.42,95.76 0 bottom
FID65  FIDUCIAL1X2  [FIDUCIAL-1X2]  35.56,157.73 0 top
FID66  FIDUCIAL1X2  [FIDUCIAL-1X2]  10.16,122.17 0 top
FID67  FIDUCIAL1X2  [FIDUCIAL-1X2]  10.16,122.17 0 bottom
FID68  FIDUCIAL1X2  [FIDUCIAL-1X2]  35.56,157.73 0 bottom
FID69  FIDUCIAL1X2  [FIDUCIAL-1X2]  68.58,157.73 0 top
FID70  FIDUCIAL1X2  [FIDUCIAL-1X2]  43.18,122.17 0 top
FID71  FIDUCIAL1X2  [FIDUCIAL-1X2]  43.18,122.17 0 bottom
FID72  FIDUCIAL1X2  [FIDUCIAL-1X2]  68.58,157.73 0 bottom
FID73  FIDUCIAL1X2  [FIDUCIAL-1X2]  101.6,157.73 0 top
FID74  FIDUCIAL1X2  [FIDUCIAL-1X2]  76.2,122.17 0 top
FID75  FIDUCIAL1X2  [FIDUCIAL-1X2]  76.2,122.17 0 bottom
FID76  FIDUCIAL1X2  [FIDUCIAL-1X2]  101.6,157.73 0 bottom
FID77  FIDUCIAL1X2  [FIDUCIAL-1X2]  134.62,157.73 0 top
FID78  FIDUCIAL1X2  [FIDUCIAL-1X2]  109.22,122.17 0 top
FID79  FIDUCIAL1X2  [FIDUCIAL-1X2]  109.22,122.17 0 bottom
FID80  FIDUCIAL1X2  [FIDUCIAL-1X2]  134.62,157.73 0 bottom
FID81  FIDUCIAL1X2  [FIDUCIAL-1X2]  35.56,205.99 0 top
FID82  FIDUCIAL1X2  [FIDUCIAL-1X2]  10.16,170.43 0 top
FID83  FIDUCIAL1X2  [FIDUCIAL-1X2]  10.16,170.43 0 bottom
FID84  FIDUCIAL1X2  [FIDUCIAL-1X2]  35.56,205.99 0 bottom
FID85  FIDUCIAL1X2  [FIDUCIAL-1X2]  68.58,205.99 0 top
FID86  FIDUCIAL1X2  [FIDUCIAL-1X2]  43.18,170.43 0 top
FID87  FIDUCIAL1X2  [FIDUCIAL-1X2]  43.18,170.43 0 bottom
FID88  FIDUCIAL1X2  [FIDUCIAL-1X2]  68.58,205.99 0 bottom
FID89  FIDUCIAL1X2  [FIDUCIAL-1X2]  101.6,205.99 0 top
FID90  FIDUCIAL1X2  [FIDUCIAL-1X2]  76.2,170.43 0 top
FID91  FIDUCIAL1X2  [FIDUCIAL-1X2]  76.2,170.43 0 bottom
FID92  FIDUCIAL1X2  [FIDUCIAL-1X2]  101.6,205.99 0 bottom
FID93  FIDUCIAL1X2  [FIDUCIAL-1X2]  134.62,205.99 0 top
FID94  FIDUCIAL1X2  [FIDUCIAL-1X2]  109.22,170.43 0 top
FID95  FIDUCIAL1X2  [FIDUCIAL-1X2]  109.22,170.43 0 bottom
FID96  FIDUCIAL1X2  [FIDUCIAL-1X2]  134.62,205.99 0 bottom
FID97  FIDUCIAL1X2  [FIDUCIAL-1X2]  181.36,157.73 0 top
FID98  FIDUCIAL1X2  [FIDUCIAL-1X2]  155.96,122.17 0 top
FID99  FIDUCIAL1X2  [FIDUCIAL-1X2]  155.96,122.17 0 bottom
FID100  FIDUCIAL1X2  [FIDUCIAL-1X2]  181.36,157.73 0 bottom
FID101  FIDUCIAL1X2  [FIDUCIAL-1X2]  214.38,157.73 0 top
FID102  FIDUCIAL1X2  [FIDUCIAL-1X2]  188.98,122.17 0 top
FID103  FIDUCIAL1X2  [FIDUCIAL-1X2]  188.98,122.17 0 bottom
FID104  FIDUCIAL1X2  [FIDUCIAL-1X2]  214.38,157.73 0 bottom
FID105  FIDUCIAL1X2  [FIDUCIAL-1X2]  247.4,157.73 0 top
FID106  FIDUCIAL1X2  [FIDUCIAL-1X2]  222,122.17 0 top
FID107  FIDUCIAL1X2  [FIDUCIAL-1X2]  222,122.17 0 bottom
FID108  FIDUCIAL1X2  [FIDUCIAL-1X2]  247.4,157.73 0 bottom
FID109  FIDUCIAL1X2  [FIDUCIAL-1X2]  280.42,157.73 0 top
FID110  FIDUCIAL1X2  [FIDUCIAL-1X2]  255.02,122.17 0 top
FID111  FIDUCIAL1X2  [FIDUCIAL-1X2]  255.02,122.17 0 bottom
FID112  FIDUCIAL1X2  [FIDUCIAL-1X2]  280.42,157.73 0 bottom
FID113  FIDUCIAL1X2  [FIDUCIAL-1X2]  181.36,205.99 0 top
FID114  FIDUCIAL1X2  [FIDUCIAL-1X2]  155.96,170.43 0 top
FID115  FIDUCIAL1X2  [FIDUCIAL-1X2]  155.96,170.43 0 bottom
FID116  FIDUCIAL1X2  [FIDUCIAL-1X2]  181.36,205.99 0 bottom
FID117  FIDUCIAL1X2  [FIDUCIAL-1X2]  214.38,205.99 0 top
FID118  FIDUCIAL1X2  [FIDUCIAL-1X2]  188.98,170.43 0 top
FID119  FIDUCIAL1X2  [FIDUCIAL-1X2]  188.98,170.43 0 bottom
FID120  FIDUCIAL1X2  [FIDUCIAL-1X2]  214.38,205.99 0 bottom
FID121  FIDUCIAL1X2  [FIDUCIAL-1X2]  247.4,205.99 0 top
FID122  FIDUCIAL1X2  [FIDUCIAL-1X2]  222,170.43 0 top
FID123  FIDUCIAL1X2  [FIDUCIAL-1X2]  222,170.43 0 bottom
FID124  FIDUCIAL1X2  [FIDUCIAL-1X2]  247.4,205.99 0 bottom
FID125  FIDUCIAL1X2  [FIDUCIAL-1X2]  280.42,205.99 0 top
FID126  FIDUCIAL1X2  [FIDUCIAL-1X2]  255.02,170.43 0 top
FID127  FIDUCIAL1X2  [FIDUCIAL-1X2]  255.02,170.43 0 bottom
FID128  FIDUCIAL1X2  [FIDUCIAL-1X2]  280.42,205.99 0 bottom
JP1  USB_MICROB  [USB-B-MICRO-SMD_V03]  17.78,49.02 270 top
JP2  USB_MICROB  [USB-B-MICRO-SMD_V03]  50.8,49.02 270 top
JP3  USB_MICROB  [USB-B-MICRO-SMD_V03]  83.82,49.02 270 top
JP4  USB_MICROB  [USB-B-MICRO-SMD_V03]  116.84,49.02 270 top
JP5  USB_MICROB  [USB-B-MICRO-SMD_V03]  17.78,97.28 270 top
JP6  USB_MICROB  [USB-B-MICRO-SMD_V03]  50.8,97.28 270 top
JP7  USB_MICROB  [USB-B-MICRO-SMD_V03]  83.82,97.28 270 top
JP8  USB_MICROB  [USB-B-MICRO-SMD_V03]  116.84,97.28 270 top
JP9  USB_MICROB  [USB-B-MICRO-SMD_V03]  163.58,49.02 270 top
JP10  USB_MICROB  [USB-B-MICRO-SMD_V03]  196.6,49.02 270 top
JP11  USB_MICROB  [USB-B-MICRO-SMD_V03]  229.62,49.02 270 top
JP12  USB_MICROB  [USB-B-MICRO-SMD_V03]  262.64,49.02 270 top
JP13  USB_MICROB  [USB-B-MICRO-SMD_V03]  163.58,97.28 270 top
JP14  USB_MICROB  [USB-B-MICRO-SMD_V03]  196.6,97.28 270 top
JP15  USB_MICROB  [USB-B-MICRO-SMD_V03]  229.62,97.28 270 top
JP16  USB_MICROB  [USB-B-MICRO-SMD_V03]  262.64,97.28 270 top
JP17  USB_MICROB  [USB-B-MICRO-SMD_V03]  17.78,159.26 270 top
JP18  USB_MICROB  [USB-B-MICRO-SMD_V03]  50.8,159.26 270 top
JP19  USB_MICROB  [USB-B-MICRO-SMD_V03]  83.82,159.26 270 top
JP20  USB_MICROB  [USB-B-MICRO-SMD_V03]  116.84,159.26 270 top
JP21  USB_MICROB  [USB-B-MICRO-SMD_V03]  17.78,207.52 270 top
JP22  USB_MICROB  [USB-B-MICRO-SMD_V03]  50.8,207.52 270 top
JP23  USB_MICROB  [USB-B-MICRO-SMD_V03]  83.82,207.52 270 top
JP24  USB_MICROB  [USB-B-MICRO-SMD_V03]  116.84,207.52 270 top
JP25  USB_MICROB  [USB-B-MICRO-SMD_V03]  163.58,159.26 270 top
JP26  USB_MICROB  [USB-B-MICRO-SMD_V03]  196.6,159.26 270 top
JP27  USB_MICROB  [USB-B-MICRO-SMD_V03]  229.62,159.26 270 top
JP28  USB_MICROB  [USB-B-MICRO-SMD_V03]  262.64,159.26 270 top
JP29  USB_MICROB  [USB-B-MICRO-SMD_V03]  163.58,207.52 270 top
JP30  USB_MICROB  [USB-B-MICRO-SMD_V03]  196.6,207.52 270 top
JP31  USB_MICROB  [USB-B-MICRO-SMD_V03]  229.62,207.52 270 top
JP32  USB_MICROB  [USB-B-MICRO-SMD_V03]  262.64,207.52 270 top
L1  1.0uH  [INDUCTOR-SRP4020]  24.89,26.04 0 top
L2  1.0uH  [INDUCTOR-SRP4020]  57.91,26.04 0 top
L3  1.0uH  [INDUCTOR-SRP4020]  90.93,26.04 0 top
L4  1.0uH  [INDUCTOR-SRP4020]  123.95,26.04 0 top
L5  1.0uH  [INDUCTOR-SRP4020]  24.89,74.3 0 top
L6  1.0uH  [INDUCTOR-SRP4020]  57.91,74.3 0 top
L7  1.0uH  [INDUCTOR-SRP4020]  90.93,74.3 0 top
L8  1.0uH  [INDUCTOR-SRP4020]  123.95,74.3 0 top
L9  1.0uH  [INDUCTOR-SRP4020]  170.69,26.04 0 top
L10  1.0uH  [INDUCTOR-SRP4020]  203.71,26.04 0 top
L11  1.0uH  [INDUCTOR-SRP4020]  236.73,26.04 0 top
L12  1.0uH  [INDUCTOR-SRP4020]  269.75,26.04 0 top
L13  1.0uH  [INDUCTOR-SRP4020]  170.69,74.3 0 top
L14  1.0uH  [INDUCTOR-SRP4020]  203.71,74.3 0 top
L15  1.0uH  [INDUCTOR-SRP4020]  236.73,74.3 0 top
L16  1.0uH  [INDUCTOR-SRP4020]  269.75,74.3 0 top
L17  1.0uH  [INDUCTOR-SRP4020]  24.89,136.27 0 top
L18  1.0uH  [INDUCTOR-SRP4020]  57.91,136.27 0 top
L19  1.0uH  [INDUCTOR-SRP4020]  90.93,136.27 0 top
L20  1.0uH  [INDUCTOR-SRP4020]  123.95,136.27 0 top
L21  1.0uH  [INDUCTOR-SRP4020]  24.89,184.53 0 top
L22  1.0uH  [INDUCTOR-SRP4020]  57.91,184.53 0 top
L23  1.0uH  [INDUCTOR-SRP4020]  90.93,184.53 0 top
L24  1.0uH  [INDUCTOR-SRP4020]  123.95,184.53 0 top
L25  1.0uH  [INDUCTOR-SRP4020]  170.69,136.27 0 top
L26  1.0uH  [INDUCTOR-SRP4020]  203.71,136.27 0 top
L27  1.0uH  [INDUCTOR-SRP4020]  236.73,136.27 0 top
L28  1.0uH  [INDUCTOR-SRP4020]  269.75,136.27 0 top
L29  1.0uH  [INDUCTOR-SRP4020]  170.69,184.53 0 top
L30  1.0uH  [INDUCTOR-SRP4020]  203.71,184.53 0 top
L31  1.0uH  [INDUCTOR-SRP4020]  236.73,184.53 0 top
L32  1.0uH  [INDUCTOR-SRP4020]  269.75,184.53 0 top
LOGO1  SFE_LOGO_NAME_FLAME.1_INCH  [SFE_LOGO_NAME_FLAME_.1]  18.16,7.11 0 top
LOGO2  OSHW-LOGOS  [OSHW-LOGO-S]  14.73,8.64 0 bottom
LOGO3  SFE_LOGO_NAME_FLAME.1_INCH  [SFE_LOGO_NAME_FLAME_.1]  29.97,7.11 0 bottom
LOGO4  OSHW-LOGOS  [OSHW-LOGO-S]  14.73,8.64 0 top
LOGO5  OSHW-LOGOS  [OSHW-LOGO-S]  47.75,8.64 0 bottom
LOGO6  SFE_LOGO_NAME_FLAME.1_INCH  [SFE_LOGO_NAME_FLAME_.1]  62.99,7.11 0 bottom
LOGO7  SFE_LOGO_NAME_FLAME.1_INCH  [SFE_LOGO_NAME_FLAME_.1]  51.18,7.11 0 top
LOGO8  OSHW-LOGOS  [OSHW-LOGO-S]  47.75,8.64 0 top
LOGO9  OSHW-LOGOS  [OSHW-LOGO-S]  80.77,8.64 0 bottom
LOGO10  SFE_LOGO_NAME_FLAME.1_INCH  [SFE_LOGO_NAME_FLAME_.1]  96.01,7.11 0 bottom
LOGO11  SFE_LOGO_NAME_FLAME.1_INCH  [SFE_LOGO_NAME_FLAME_.1]  84.2,7.11 0 top
LOGO12  OSHW-LOGOS  [OSHW-LOGO-S]  80.77,8.64 0 top
LOGO13  OSHW-LOGOS  [OSHW-LOGO-S]  113.79,8.64 0 bottom
LOGO14  SFE_LOGO_NAME_FLAME.1_INCH  [SFE_LOGO_NAME_FLAME_.1]  129.03,7.11 0 bottom
LOGO15  SFE_LOGO_NAME_FLAME.1_INCH  [SFE_LOGO_NAME_FLAME_.1]  117.22,7.11 0 top
LOGO16  OSHW-LOGOS  [OSHW-LOGO-S]  113.79,8.64 0 top
LOGO17  OSHW-LOGOS  [OSHW-LOGO-S]  14.73,56.9 0 bottom
LOGO18  SFE_LOGO_NAME_FLAME.1_INCH  [SFE_LOGO_NAME_FLAME_.1]  29.97,55.37 0 bottom
LOGO19  SFE_LOGO_NAME_FLAME.1_INCH  [SFE_LOGO_NAME_FLAME_.1]  18.16,55.37 0 top
LOGO20  OSHW-LOGOS  [OSHW-LOGO-S]  14.73,56.9 0 top
LOGO21  OSHW-LOGOS  [OSHW-LOGO-S]  47.75,56.9 0 bottom
LOGO22  SFE_LOGO_NAME_FLAME.1_INCH  [SFE_LOGO_NAME_FLAME_.1]  62.99,55.37 0 bottom
LOGO23  SFE_LOGO_NAME_FLAME.1_INCH  [SFE_LOGO_NAME_FLAME_.1]  51.18,55.37 0 top
LOGO24  OSHW-LOGOS  [OSHW-LOGO-S]  47.75,56.9 0 top
LOGO25  OSHW-LOGOS  [OSHW-LOGO-S]  80.77,56.9 0 bottom
LOGO26  SFE_LOGO_NAME_FLAME.1_INCH  [SFE_LOGO_NAME_FLAME_.1]  96.01,55.37 0 bottom
LOGO27  SFE_LOGO_NAME_FLAME.1_INCH  [SFE_LOGO_NAME_FLAME_.1]  84.2,55.37 0 top
LOGO28  OSHW-LOGOS  [OSHW-LOGO-S]  80.77,56.9 0 top
LOGO29  OSHW-LOGOS  [OSHW-LOGO-S]  113.79,56.9 0 bottom
LOGO30  SFE_LOGO_NAME_FLAME.1_INCH  [SFE_LOGO_NAME_FLAME_.1]  129.03,55.37 0 bottom
LOGO31  SFE_LOGO_NAME_FLAME.1_INCH  [SFE_LOGO_NAME_FLAME_.1]  117.22,55.37 0 top
LOGO32  OSHW-LOGOS  [OSHW-LOGO-S]  113.79,56.9 0 top
LOGO33  OSHW-LOGOS  [OSHW-LOGO-S]  160.53,8.64 0 bottom
LOGO34  SFE_LOGO_NAME_FLAME.1_INCH  [SFE_LOGO_NAME_FLAME_.1]  175.77,7.11 0 bottom
LOGO35  SFE_LOGO_NAME_FLAME.1_INCH  [SFE_LOGO_NAME_FLAME_.1]  163.96,7.11 0 top
LOGO36  OSHW-LOGOS  [OSHW-LOGO-S]  160.53,8.64 0 top
LOGO37  OSHW-LOGOS  [OSHW-LOGO-S]  193.55,8.64 0 bottom
LOGO38  SFE_LOGO_NAME_FLAME.1_INCH  [SFE_LOGO_NAME_FLAME_.1]  208.79,7.11 0 bottom
LOGO39  SFE_LOGO_NAME_FLAME.1_INCH  [SFE_LOGO_NAME_FLAME_.1]  196.98,7.11 0 top
LOGO40  OSHW-LOGOS  [OSHW-LOGO-S]  193.55,8.64 0 top
LOGO41  OSHW-LOGOS  [OSHW-LOGO-S]  226.57,8.64 0 bottom
LOGO42  SFE_LOGO_NAME_FLAME.1_INCH  [SFE_LOGO_NAME_FLAME_.1]  241.81,7.11 0 bottom
LOGO43  SFE_LOGO_NAME_FLAME.1_INCH  [SFE_LOGO_NAME_FLAME_.1]  230,7.11 0 top
LOGO44  OSHW-LOGOS  [OSHW-LOGO-S]  226.57,8.64 0 top
LOGO45  OSHW-LOGOS  [OSHW-LOGO-S]  259.59,8.64 0 bottom
LOGO46  SFE_LOGO_NAME_FLAME.1_INCH  [SFE_LOGO_NAME_FLAME_.1]  274.83,7.11 0 bottom
LOGO47  SFE_LOGO_NAME_FLAME.1_INCH  [SFE_LOGO_NAME_FLAME_.1]  263.02,7.11 0 top
LOGO48  OSHW-LOGOS  [OSHW-LOGO-S]  259.59,8.64 0 top
LOGO49  OSHW-LOGOS  [OSHW-LOGO-S]  160.53,56.9 0 bottom
LOGO50  SFE_LOGO_NAME_FLAME.1_INCH  [SFE_LOGO_NAME_FLAME_.1]  175.77,55.37 0 bottom
LOGO51  SFE_LOGO_NAME_FLAME.1_INCH  [SFE_LOGO_NAME_FLAME_.1]  163.96,55.37 0 top
LOGO52  OSHW-LOGOS  [OSHW-LOGO-S]  160.53,56.9 0 top
LOGO53  OSHW-LOGOS  [OSHW-LOGO-S]  193.55,56.9 0 bottom
LOGO54  SFE_LOGO_NAME_FLAME.1_INCH  [SFE_LOGO_NAME_FLAME_.1]  208.79,55.37 0 bottom
LOGO55  SFE_LOGO_NAME_FLAME.1_INCH  [SFE_LOGO_NAME_FLAME_.1]  196.98,55.37 0 top
LOGO56  OSHW-LOGOS  [OSHW-LOGO-S]  193.55,56.9 0 top
LOGO57  OSHW-LOGOS  [OSHW-LOGO-S]  226.57,56.9 0 bottom
LOGO58  SFE_LOGO_NAME_FLAME.1_INCH  [SFE_LOGO_NAME_FLAME_.1]  241.81,55.37 0 bottom
LOGO59  SFE_LOGO_NAME_FLAME.1_INCH  [SFE_LOGO_NAME_FLAME_.1]  230,55.37 0 top
LOGO60  OSHW-LOGOS  [OSHW-LOGO-S]  226.57,56.9 0 top
LOGO61  OSHW-LOGOS  [OSHW-LOGO-S]  259.59,56.9 0 bottom
LOGO62  SFE_LOGO_NAME_FLAME.1_INCH  [SFE_LOGO_NAME_FLAME_.1]  274.83,55.37 0 bottom
LOGO63  SFE_LOGO_NAME_FLAME.1_INCH  [SFE_LOGO_NAME_FLAME_.1]  263.02,55.37 0 top
LOGO64  OSHW-LOGOS  [OSHW-LOGO-S]  259.59,56.9 0 top
LOGO65  OSHW-LOGOS  [OSHW-LOGO-S]  14.73,118.87 0 bottom
LOGO66  SFE_LOGO_NAME_FLAME.1_INCH  [SFE_LOGO_NAME_FLAME_.1]  29.97,117.35 0 bottom
LOGO67  SFE_LOGO_NAME_FLAME.1_INCH  [SFE_LOGO_NAME_FLAME_.1]  18.16,117.35 0 top
LOGO68  OSHW-LOGOS  [OSHW-LOGO-S]  14.73,118.87 0 top
LOGO69  OSHW-LOGOS  [OSHW-LOGO-S]  47.75,118.87 0 bottom
LOGO70  SFE_LOGO_NAME_FLAME.1_INCH  [SFE_LOGO_NAME_FLAME_.1]  62.99,117.35 0 bottom
LOGO71  SFE_LOGO_NAME_FLAME.1_INCH  [SFE_LOGO_NAME_FLAME_.1]  51.18,117.35 0 top
LOGO72  OSHW-LOGOS  [OSHW-LOGO-S]  47.75,118.87 0 top
LOGO73  OSHW-LOGOS  [OSHW-LOGO-S]  80.77,118.87 0 bottom
LOGO74  SFE_LOGO_NAME_FLAME.1_INCH  [SFE_LOGO_NAME_FLAME_.1]  96.01,117.35 0 bottom
LOGO75  SFE_LOGO_NAME_FLAME.1_INCH  [SFE_LOGO_NAME_FLAME_.1]  84.2,117.35 0 top
LOGO76  OSHW-LOGOS  [OSHW-LOGO-S]  80.77,118.87 0 top
LOGO77  OSHW-LOGOS  [OSHW-LOGO-S]  113.79,118.87 0 bottom
LOGO78  SFE_LOGO_NAME_FLAME.1_INCH  [SFE_LOGO_NAME_FLAME_.1]  129.03,117.35 0 bottom
LOGO79  SFE_LOGO_NAME_FLAME.1_INCH  [SFE_LOGO_NAME_FLAME_.1]  117.22,117.35 0 top
LOGO80  OSHW-LOGOS  [OSHW-LOGO-S]  113.79,118.87 0 top
LOGO81  OSHW-LOGOS  [OSHW-LOGO-S]  14.73,167.13 0 bottom
LOGO82  SFE_LOGO_NAME_FLAME.1_INCH  [SFE_LOGO_NAME_FLAME_.1]  29.97,165.61 0 bottom
LOGO83  SFE_LOGO_NAME_FLAME.1_INCH  [SFE_LOGO_NAME_FLAME_.1]  18.16,165.61 0 top
LOGO84  OSHW-LOGOS  [OSHW-LOGO-S]  14.73,167.13 0 top
LOGO85  OSHW-LOGOS  [OSHW-LOGO-S]  47.75,167.13 0 bottom
LOGO86  SFE_LOGO_NAME_FLAME.1_INCH  [SFE_LOGO_NAME_FLAME_.1]  62.99,165.61 0 bottom
LOGO87  SFE_LOGO_NAME_FLAME.1_INCH  [SFE_LOGO_NAME_FLAME_.1]  51.18,165.61 0 top
LOGO88  OSHW-LOGOS  [OSHW-LOGO-S]  47.75,167.13 0 top
LOGO89  OSHW-LOGOS  [OSHW-LOGO-S]  80.77,167.13 0 bottom
LOGO90  SFE_LOGO_NAME_FLAME.1_INCH  [SFE_LOGO_NAME_FLAME_.1]  96.01,165.61 0 bottom
LOGO91  SFE_LOGO_NAME_FLAME.1_INCH  [SFE_LOGO_NAME_FLAME_.1]  84.2,165.61 0 top
LOGO92  OSHW-LOGOS  [OSHW-LOGO-S]  80.77,167.13 0 top
LOGO93  OSHW-LOGOS  [OSHW-LOGO-S]  113.79,167.13 0 bottom
LOGO94  SFE_LOGO_NAME_FLAME.1_INCH  [SFE_LOGO_NAME_FLAME_.1]  129.03,165.61 0 bottom
LOGO95  SFE_LOGO_NAME_FLAME.1_INCH  [SFE_LOGO_NAME_FLAME_.1]  117.22,165.61 0 top
LOGO96  OSHW-LOGOS  [OSHW-LOGO-S]  113.79,167.13 0 top
LOGO97  OSHW-LOGOS  [OSHW-LOGO-S]  160.53,118.87 0 bottom
LOGO98  SFE_LOGO_NAME_FLAME.1_INCH  [SFE_LOGO_NAME_FLAME_.1]  175.77,117.35 0 bottom
LOGO99  SFE_LOGO_NAME_FLAME.1_INCH  [SFE_LOGO_NAME_FLAME_.1]  163.96,117.35 0 top
LOGO100  OSHW-LOGOS  [OSHW-LOGO-S]  160.53,118.87 0 top
LOGO101  OSHW-LOGOS  [OSHW-LOGO-S]  193.55,118.87 0 bottom
LOGO102  SFE_LOGO_NAME_FLAME.1_INCH  [SFE_LOGO_NAME_FLAME_.1]  208.79,117.35 0 bottom
LOGO103  SFE_LOGO_NAME_FLAME.1_INCH  [SFE_LOGO_NAME_FLAME_.1]  196.98,117.35 0 top
LOGO104  OSHW-LOGOS  [OSHW-LOGO-S]  193.55,118.87 0 top
LOGO105  OSHW-LOGOS  [OSHW-LOGO-S]  226.57,118.87 0 bottom
LOGO106  SFE_LOGO_NAME_FLAME.1_INCH  [SFE_LOGO_NAME_FLAME_.1]  241.81,117.35 0 bottom
LOGO107  SFE_LOGO_NAME_FLAME.1_INCH  [SFE_LOGO_NAME_FLAME_.1]  230,117.35 0 top
LOGO108  OSHW-LOGOS  [OSHW-LOGO-S]  226.57,118.87 0 top
LOGO109  OSHW-LOGOS  [OSHW-LOGO-S]  259.59,118.87 0 bottom
LOGO110  SFE_LOGO_NAME_FLAME.1_INCH  [SFE_LOGO_NAME_FLAME_.1]  274.83,117.35 0 bottom
LOGO111  SFE_LOGO_NAME_FLAME.1_INCH  [SFE_LOGO_NAME_FLAME_.1]  263.02,117.35 0 top
LOGO112  OSHW-LOGOS  [OSHW-LOGO-S]  259.59,118.87 0 top
LOGO113  OSHW-LOGOS  [OSHW-LOGO-S]  160.53,167.13 0 bottom
LOGO114  SFE_LOGO_NAME_FLAME.1_INCH  [SFE_LOGO_NAME_FLAME_.1]  175.77,165.61 0 bottom
LOGO115  SFE_LOGO_NAME_FLAME.1_INCH  [SFE_LOGO_NAME_FLAME_.1]  163.96,165.61 0 top
LOGO116  OSHW-LOGOS  [OSHW-LOGO-S]  160.53,167.13 0 top
LOGO117  OSHW-LOGOS  [OSHW-LOGO-S]  193.55,167.13 0 bottom
LOGO118  SFE_LOGO_NAME_FLAME.1_INCH  [SFE_LOGO_NAME_FLAME_.1]  208.79,165.61 0 bottom
LOGO119  SFE_LOGO_NAME_FLAME.1_INCH  [SFE_LOGO_NAME_FLAME_.1]  196.98,165.61 0 top
LOGO120  OSHW-LOGOS  [OSHW-LOGO-S]  193.55,167.13 0 top
LOGO121  OSHW-LOGOS  [OSHW-LOGO-S]  226.57,167.13 0 bottom
LOGO122  SFE_LOGO_NAME_FLAME.1_INCH  [SFE_LOGO_NAME_FLAME_.1]  241.81,165.61 0 bottom
LOGO123  SFE_LOGO_NAME_FLAME.1_INCH  [SFE_LOGO_NAME_FLAME_.1]  230,165.61 0 top
LOGO124  OSHW-LOGOS  [OSHW-LOGO-S]  226.57,167.13 0 top
LOGO125  OSHW-LOGOS  [OSHW-LOGO-S]  259.59,167.13 0 bottom
LOGO126  SFE_LOGO_NAME_FLAME.1_INCH  [SFE_LOGO_NAME_FLAME_.1]  274.83,165.61 0 bottom
LOGO127  SFE_LOGO_NAME_FLAME.1_INCH  [SFE_LOGO_NAME_FLAME_.1]  263.02,165.61 0 top
LOGO128  OSHW-LOGOS  [OSHW-LOGO-S]  259.59,167.13 0 top
Q1  BSS138  [SOT23-3]  19.05,27.18 90 top
Q2  BSS138  [SOT23-3]  52.07,27.18 90 top
Q3  BSS138  [SOT23-3]  85.09,27.18 90 top
Q4  BSS138  [SOT23-3]  118.11,27.18 90 top
Q5  BSS138  [SOT23-3]  19.05,75.44 90 top
Q6  BSS138  [SOT23-3]  52.07,75.44 90 top
Q7  BSS138  [SOT23-3]  85.09,75.44 90 top
Q8  BSS138  [SOT23-3]  118.11,75.44 90 top
Q9  BSS138  [SOT23-3]  164.85,27.18 90 top
Q10  BSS138  [SOT23-3]  197.87,27.18 90 top
Q11  BSS138  [SOT23-3]  230.89,27.18 90 top
Q12  BSS138  [SOT23-3]  263.91,27.18 90 top
Q13  BSS138  [SOT23-3]  164.85,75.44 90 top
Q14  BSS138  [SOT23-3]  197.87,75.44 90 top
Q15  BSS138  [SOT23-3]  230.89,75.44 90 top
Q16  BSS138  [SOT23-3]  263.91,75.44 90 top
Q17  BSS138  [SOT23-3]  19.05,137.41 90 top
Q18  BSS138  [SOT23-3]  52.07,137.41 90 top
Q19  BSS138  [SOT23-3]  85.09,137.41 90 top
Q20  BSS138  [SOT23-3]  118.11,137.41 90 top
Q21  BSS138  [SOT23-3]  19.05,185.67 90 top
Q22  BSS138  [SOT23-3]  52.07,185.67 90 top
Q23  BSS138  [SOT23-3]  85.09,185.67 90 top
Q24  BSS138  [SOT23-3]  118.11,185.67 90 top
Q25  BSS138  [SOT23-3]  164.85,137.41 90 top
Q26  BSS138  [SOT23-3]  197.87,137.41 90 top
Q27  BSS138  [SOT23-3]  230.89,137.41 90 top
Q28  BSS138  [SOT23-3]  263.91,137.41 90 top
Q29  BSS138  [SOT23-3]  164.85,185.67 90 top
Q30  BSS138  [SOT23-3]  197.87,185.67 90 top
Q31  BSS138  [SOT23-3]  230.89,185.67 90 top
Q32  BSS138  [SOT23-3]  263.91,185.67 90 top
R1  27  [0603]  19.05,43.43 270 top
R2  27  [0603]  17.53,43.43 270 top
R3  1K  [0603-RES]  11.43,33.78 270 top
R4  1K  [0603-RES]  11.43,38.1 270 top
R5  1K  [0603-RES]  11.43,45.34 270 top
R6  100  [0603-RES]  29.72,13.46 0 top
R7  100  [0603-RES]  29.72,11.94 0 top
R8  10K  [0603-RES]  13.46,26.54 270 top
R9  220  [0603-RES]  15.49,26.54 90 top
R10  287  [0603-RES]  25.78,40.39 90 top
R11  10K  [0603-RES]  22.99,37.97 90 top
R12  100k  [0603-RES]  37.26,31.45 0 top
R13  680k  [0603-RES]  27.05,22.1 90 top
R14  120k  [0603-RES]  27.05,18.67 90 top
R15  1K  [0603-RES]  20.32,23.37 270 top
R16  27  [0603]  52.07,43.43 270 top
R17  27  [0603]  50.55,43.43 270 top
R18  1K  [0603-RES]  44.45,33.78 270 top
R19  1K  [0603-RES]  44.45,38.1 270 top
R20  1K  [0603-RES]  44.45,45.34 270 top
R21  100  [0603-RES]  62.74,13.46 0 top
R22  100  [0603-RES]  62.74,11.94 0 top
R23  10K  [0603-RES]  46.48,26.54 270 top
R24  220  [0603-RES]  48.51,26.54 90 top
R25  287  [0603-RES]  58.8,40.39 90 top
R26  10K  [0603-RES]  56.01,37.97 90 top
R27  100k  [0603-RES]  70.28,31.45 0 top
R28  680k  [0603-RES]  60.07,22.1 90 top
R29  120k  [0603-RES]  60.07,18.67 90 top
R30  1K  [0603-RES]  53.34,23.37 270 top
R31  27  [0603]  85.09,43.43 270 top
R32  27  [0603]  83.57,43.43 270 top
R33  1K  [0603-RES]  77.47,33.78 270 top
R34  1K  [0603-RES]  77.47,38.1 270 top
R35  1K  [0603-RES]  77.47,45.34 270 top
R36  100  [0603-RES]  95.76,13.46 0 top
R37  100  [0603-RES]  95.76,11.94 0 top
R38  10K  [0603-RES]  79.5,26.54 270 top
R39  220  [0603-RES]  81.53,26.54 90 top
R40  287  [0603-RES]  91.82,40.39 90 top
R41  10K  [0603-RES]  89.03,37.97 90 top
R42  100k  [0603-RES]  103.3,31.45 0 top
R43  680k  [0603-RES]  93.09,22.1 90 top
R44  120k  [0603-RES]  93.09,18.67 90 top